# Altium PCB Connected_Cube.PcbDoc (part 1 of 4)
Units mil, origin at the board's own origin, x right, y up, seen from the top; angles counter-clockwise.
Board outline 4960.63 x 3700.79 mil, 4 copper layers (Top Layer, GND, Power, Bottom Layer), stack 47.164 mil thick; 209 components, 203 nets, 946 pads, 737 vias.
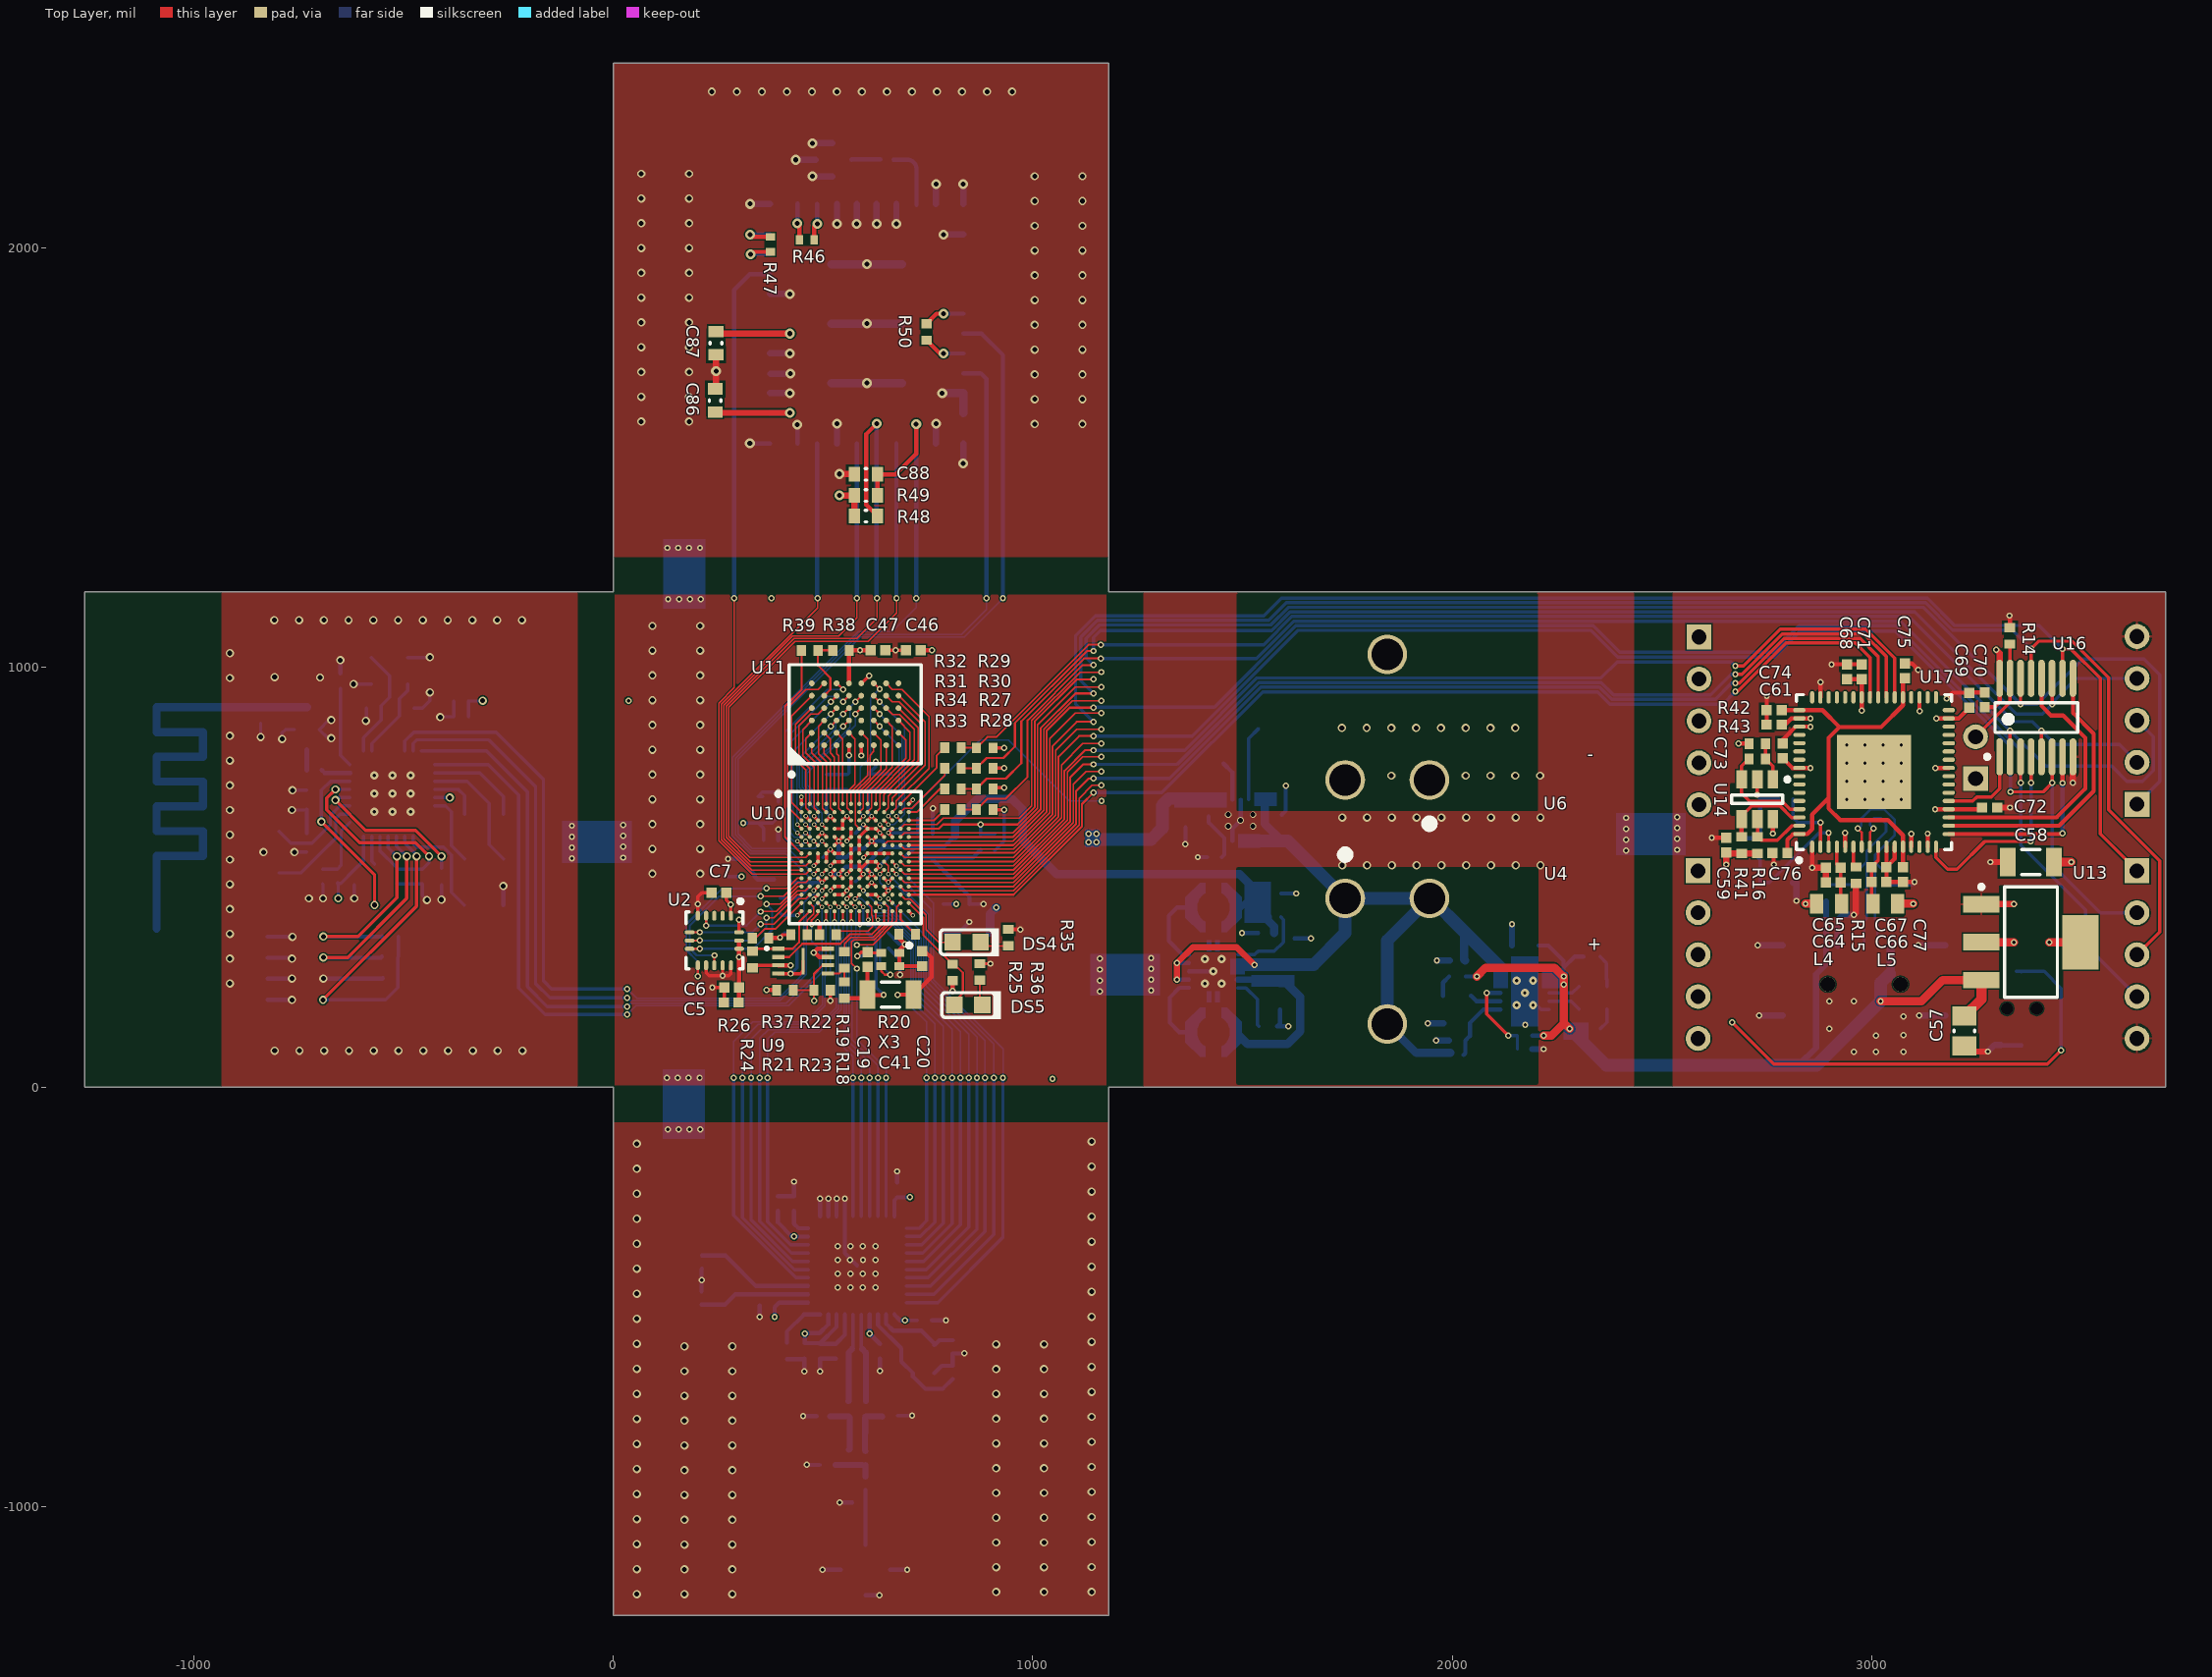
[diagram p0: Top Layer view]
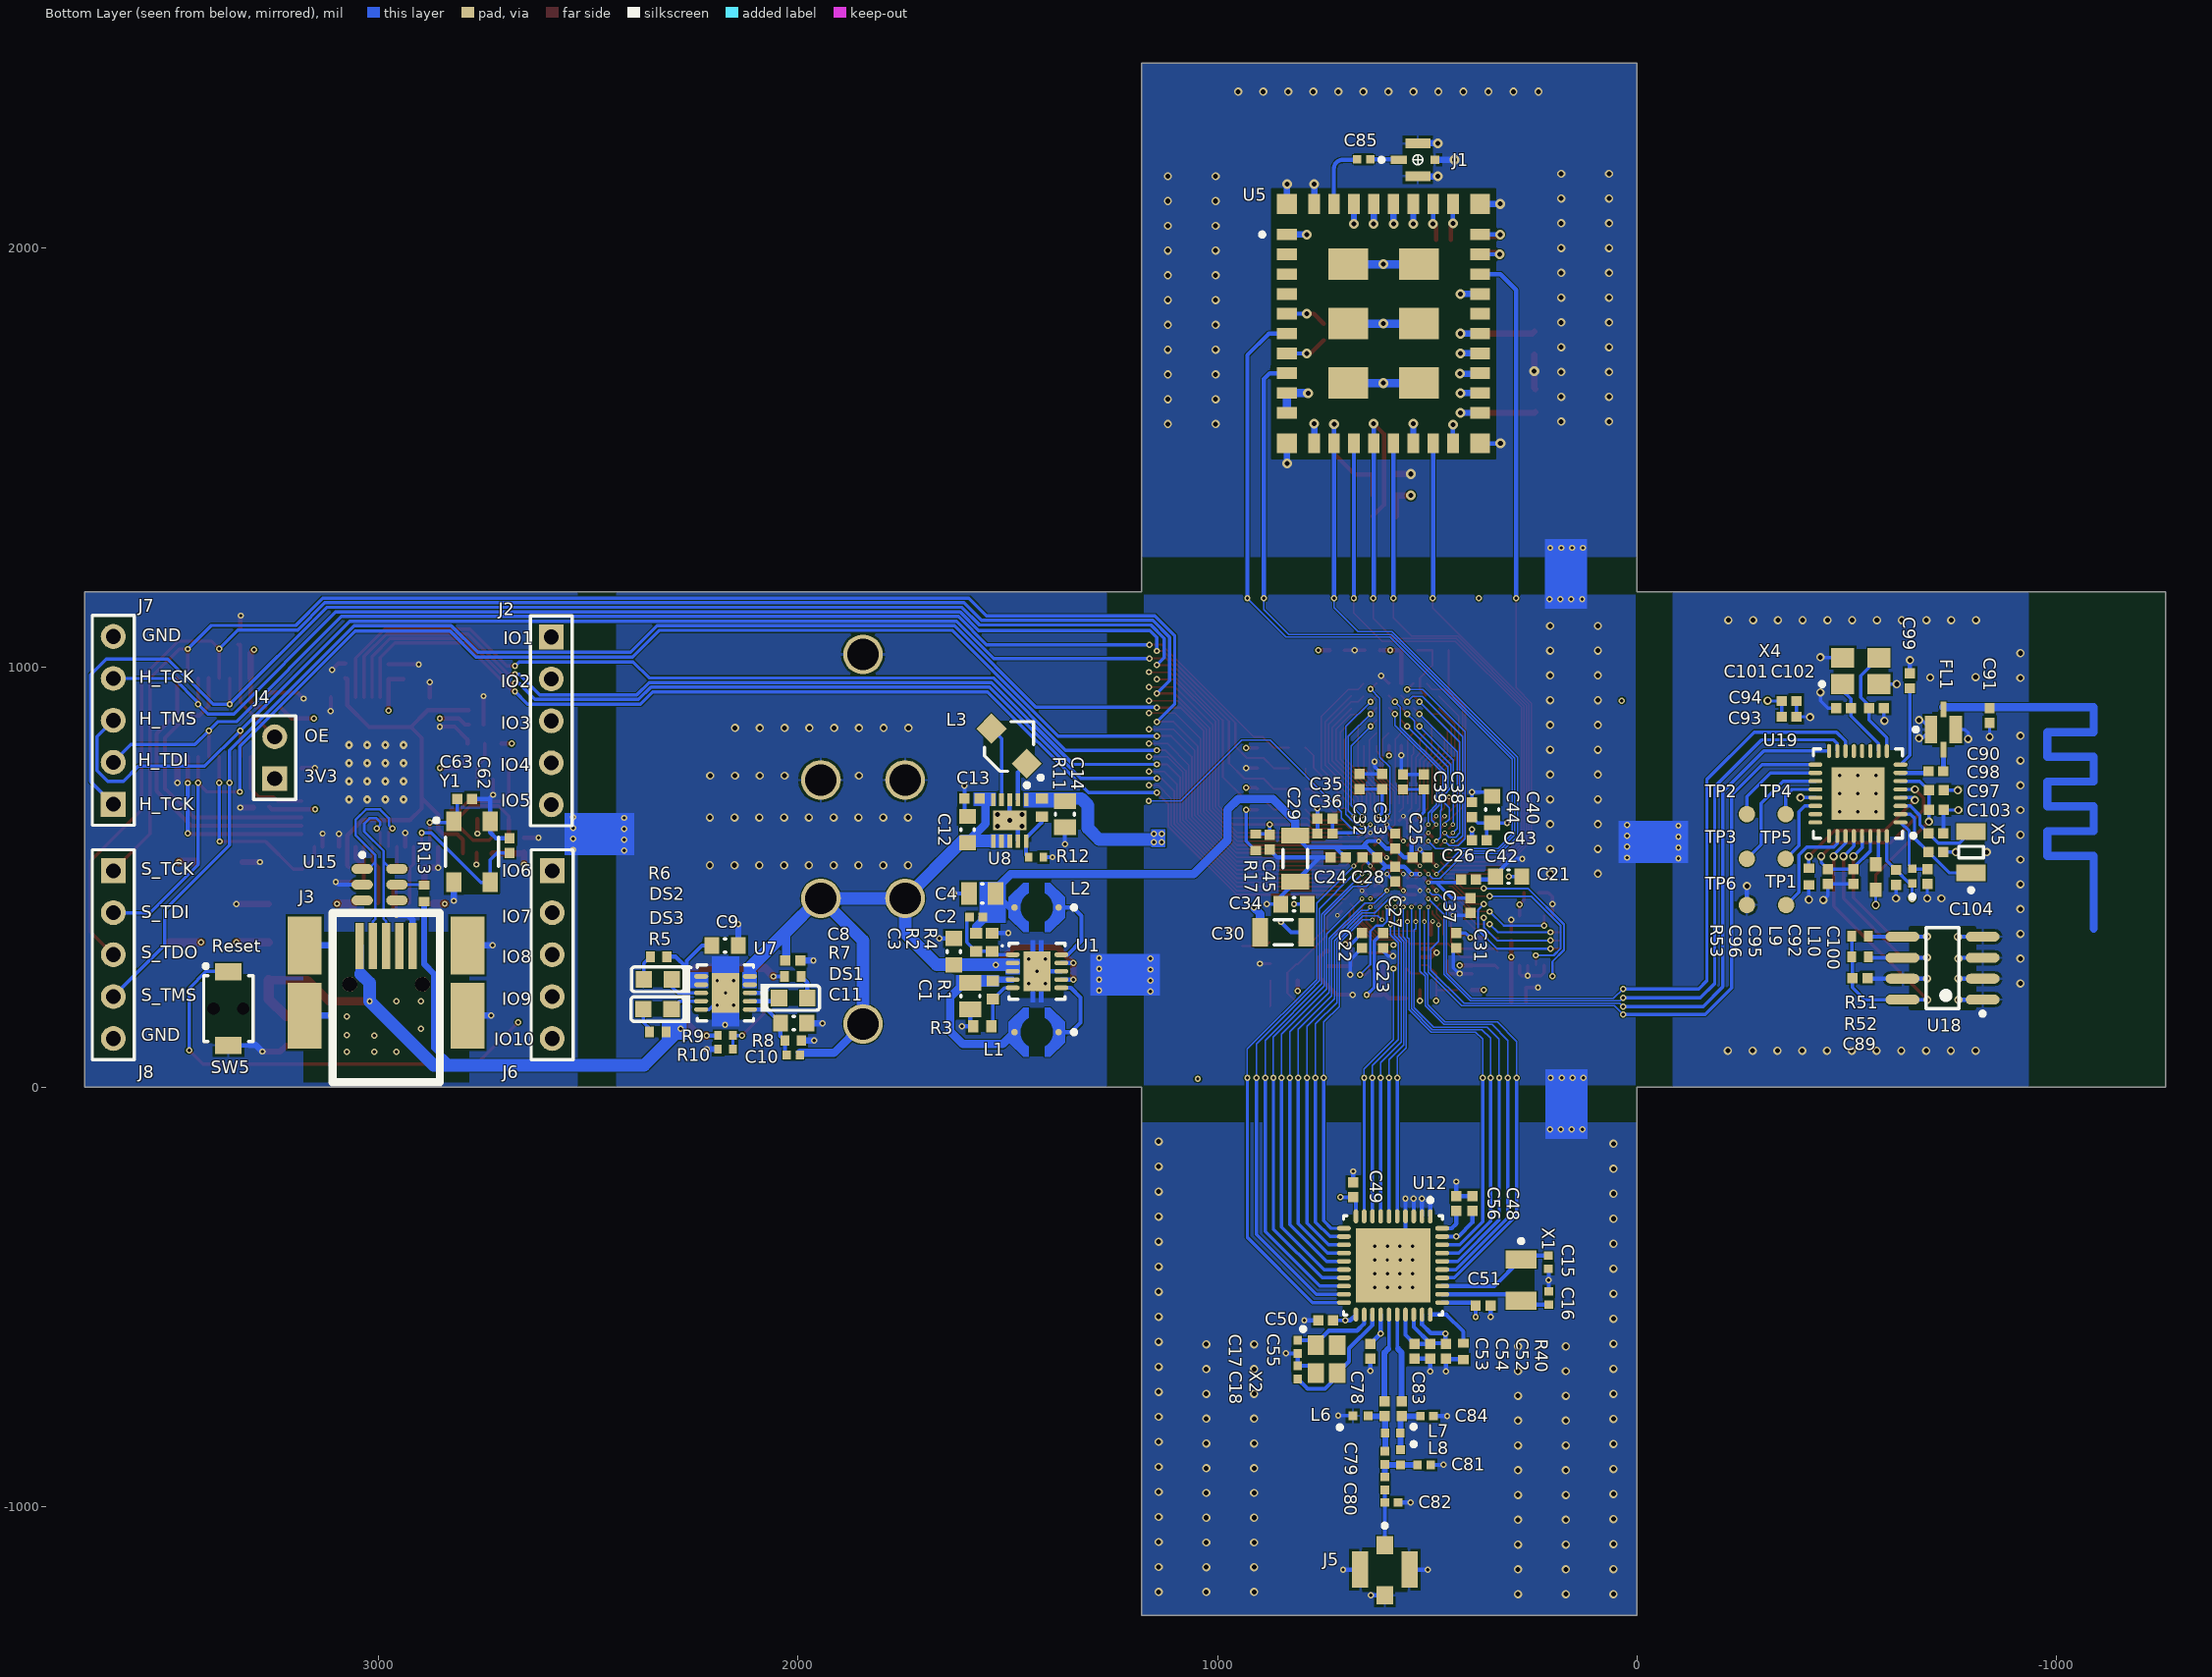
[diagram p1: Bottom Layer view, seen from below]
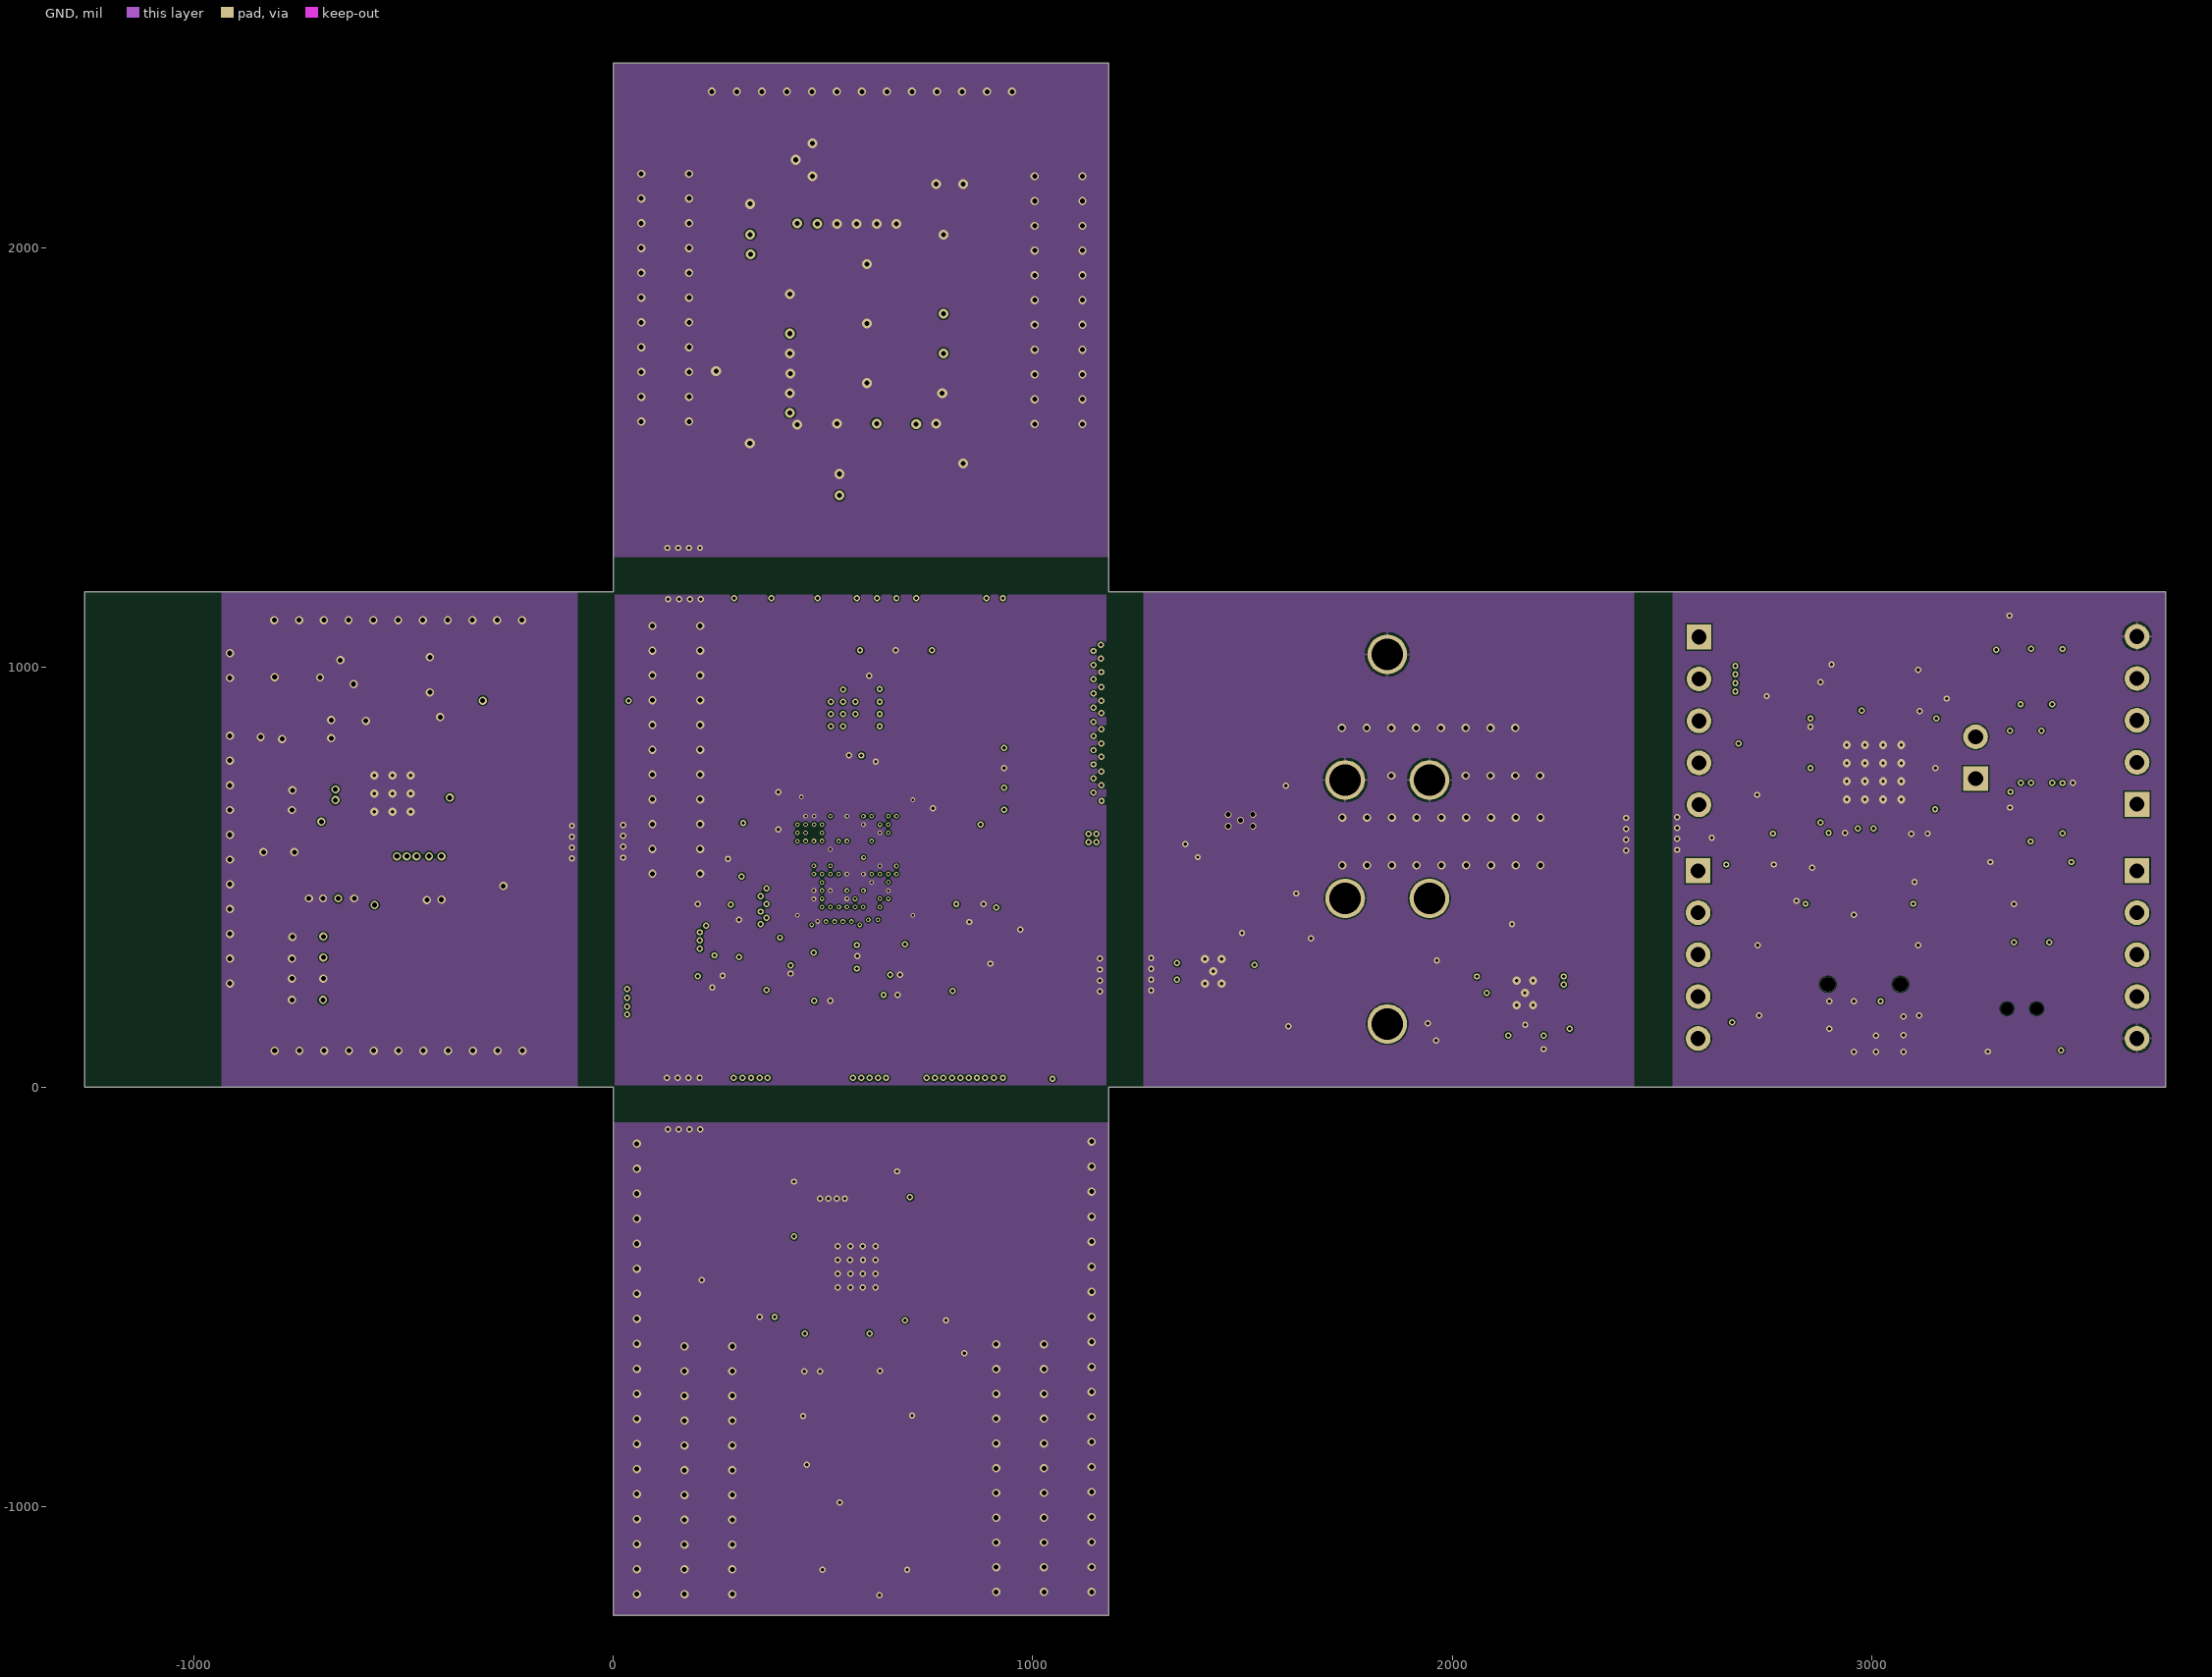
[diagram p2: GND]
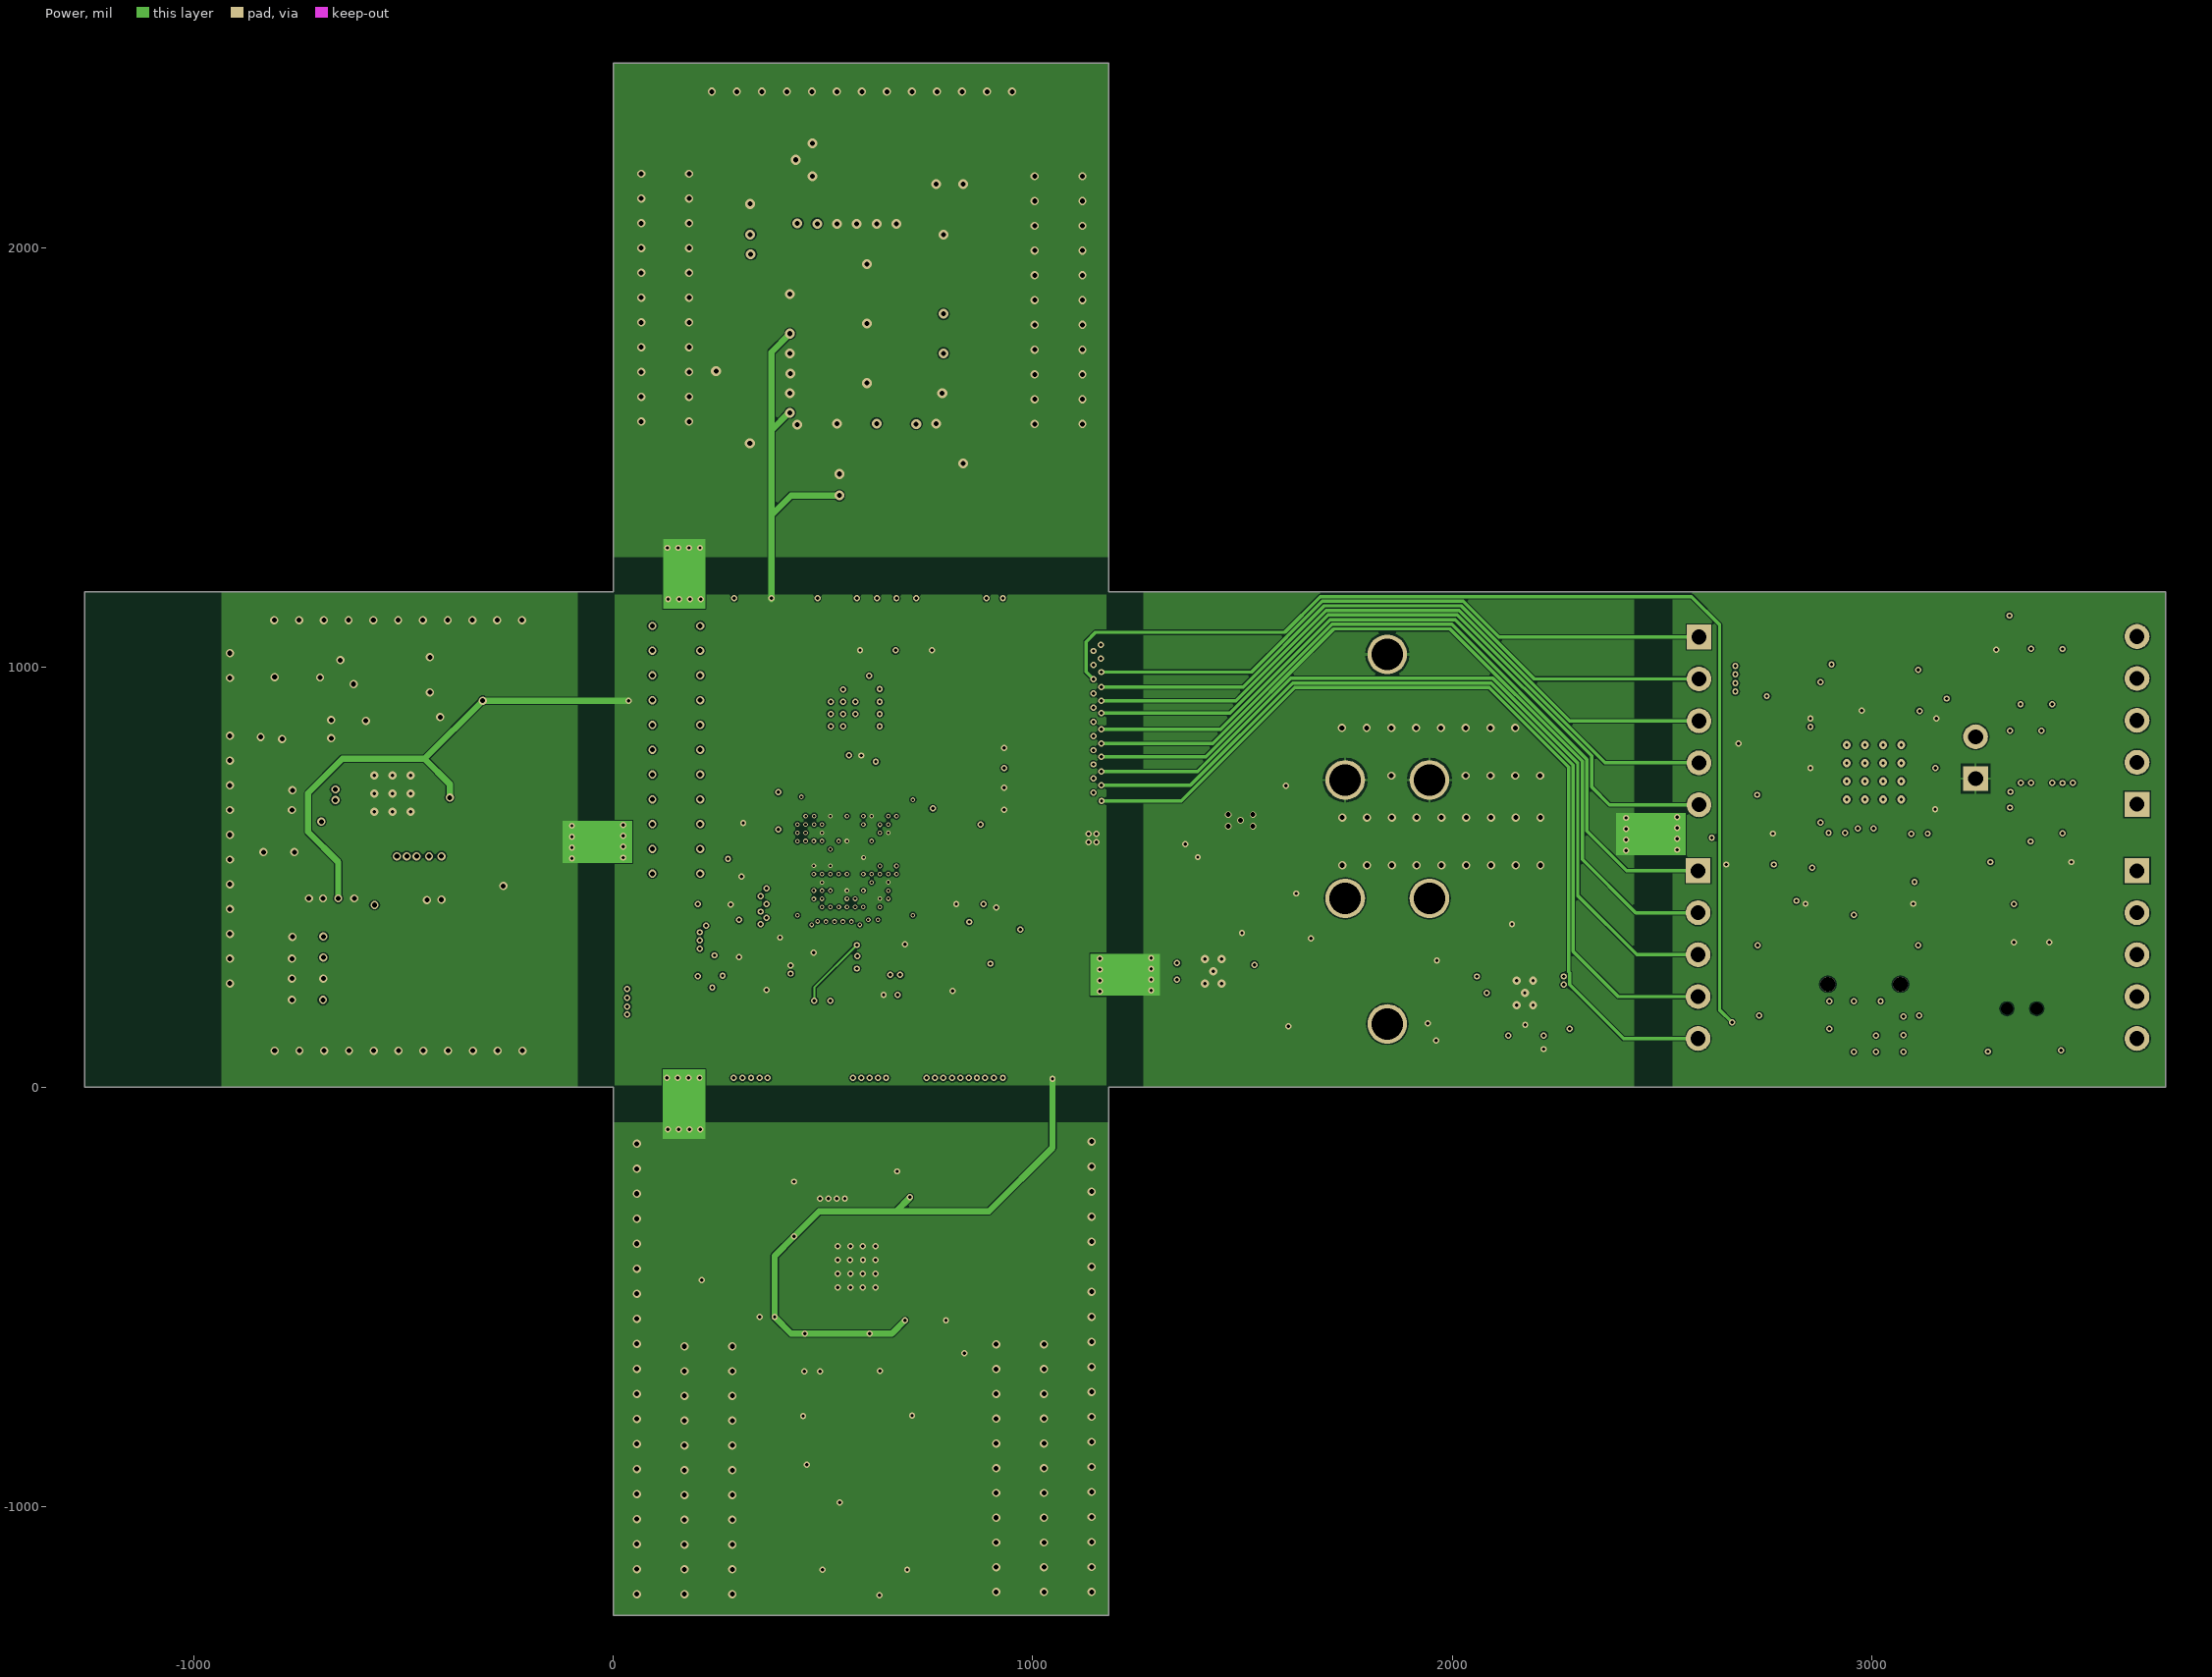
[diagram p3: Power]

## Layer stack, top to bottom
Top Solder: solder mask 0.394, Solder Resist, Dk 3.5
Top Layer: signal copper 1.417
Dielectric 1: prepreg 4.803, FR-4, Dk 4.2
GND: signal copper 1.417
DielectricLayer: core 31.89, Dk 4.2
Power: signal copper 1.417
DielectricLayer: prepreg 4.803, Dk 4.2
Bottom Layer: signal copper 1.417
Bottom Solder: solder mask 0.394, Solder Resist, Dk 3.5

## Board outline
-1259.84,0 0,0 0,-1259.84 1181.1,-1259.84 1181.1,0 3700.79,0 3700.79,1181.1 1181.1,1181.1 1181.1,2440.95 0,2440.95 0,1181.1 -1259.84,1181.1
board region "Layer Stack Region 2": 2519.68,1181.1 3700.79,1181.1 3700.79,0 2519.68,0
board region "Layer Stack Region 2": 2519.69,0 2440.94,0 2440.94,1181.1 2519.69,1181.1
board region "Layer Stack Region 2": 1181.1,-78.74 1181.1,-1259.84 0,-1259.84 0,-78.74
board region "Layer Stack Region 2": 1181.1,1181.1 1259.84,1181.1 1259.84,0 1181.1,0
board region "Layer Stack Region 2": 2440.95,0 1259.84,0 1259.84,1181.1 2440.95,1181.1
board region "Layer Stack Region 2": 0,-78.74 0,0 1181.1,0 1181.1,-78.74
board region "Layer Stack Region 2": 0,1259.84 0,2440.95 1181.1,2440.95 1181.1,1259.84
board region "Layer Stack Region 2": 1181.1,1181.1 0,1181.1 0,1259.84 1181.1,1259.84
board region "Layer Stack Region 2": 1181.1,0 0,0 0,1181.1 1181.1,1181.1
board region "Layer Stack Region 2": 0,1181.1 0,0 -78.74,0 -78.74,1181.1
board region "Layer Stack Region 1": -78.74,0 -1259.84,0 -1259.84,1181.1 -78.74,1181.1

## Design rules (kind name [scope] priority, off if disabled: settings)
Clearance SRAM1 [Ispad and InComponent('U13') vs Isvia] p1: gap=4
Clearance SRAM0 [Ispad and InComponent('U10') vs IsVia] p2: gap=3
Clearance "USB DATA" [InNet('D_N') vs InNet('D_P')] p3: gap=8
Clearance Clearance_PWR [InNetClass('PWR') vs InNetClass('PWR')] p4: gap=6
Clearance Clearance_Polygon [InPolygon vs InPolygon] p5: gap=6
Clearance Clear [All] p6: gap=3
ComponentClearance [Not InComponentClass('PCBModule') vs Not InComponentClass('PCBModule')] p1: gap=10 collisioncheckmode=3 verticalgap=3.94 showdistances=FALSE
DiffPairsRouting [All] p1: maxlimit=15 minlimit=5 mostfreqgap=15 toplayer_minwidth=5 toplayer_maxwidth=15 toplayer_prefwidth=15 midlayer1_minwidth=5 midlayer1_maxwidth=15 midlayer1_prefwidth=15 midlayer2_minwidth=5 midlayer2_maxwidth=15 midlayer2_prefwidth=15 bottomlayer_minwidth=5 bottomlayer_maxwidth=15 bottomlayer_prefwidth=15 maxuncoupledlength=500
HoleSize [All] p1: absolutevalues=TRUE maxlimit=216.54 minlimit=1 maxpercent=80.000 minpercent=20.000
MinimumSolderMaskSliver [All] p1: minsoldermaskwidth=3
NetAntennae NetAntennae_1 [InNet('ANT_RF')] p1: netantennaetolerance=99999
NetAntennae [All] p2: netantennaetolerance=0
PolygonConnect FT2232 [All vs (ObjectKind = 'Pad') And (Layer = 'Top Layer') And (Name = 'U3-65')] p1: connectstyle=Direct reliefconductorwidth=10 reliefentries=4 polygonreliefangle="90 Angle" airgapwidth=10
PolygonConnect PolygonConnect_Via [IsVia] p2: connectstyle=Direct reliefconductorwidth=10 reliefentries=4 polygonreliefangle="90 Angle" airgapwidth=10
PolygonConnect [All] p3: connectstyle=Relief reliefconductorwidth=5.91 reliefentries=4 polygonreliefangle="90 Angle" airgapwidth=5.91
RoutingVias [All] p1: holewidth=6 width=11 viastyle="Through Hole" minholewidth=4 minwidth=10 maxholewidth=12 maxwidth=20
ShortCircuit [IsRegion vs IsPolygon] p1: allowed=TRUE
SilkToSilkClearance SilkToSilkClearance_1 [(ObjectKind = 'Text') And (StringText = 'Designed & Made in China') vs (ObjectKind = 'Text') And (StringText = 'Digital Designer Board')] p1: silktosilkclearance=0
SilkToSilkClearance [All] p2: silktosilkclearance=0
SilkToSolderMaskClearance Soldermasker_j3 [ispad and InComponent('j3')] p1: minsilkscreentomaskgap=0 clearancetoexposedcopper=TRUE
SilkToSolderMaskClearance Soldermasker_j9 [ispad and InComponent('j9')] p2: minsilkscreentomaskgap=0 clearancetoexposedcopper=TRUE
SilkToSolderMaskClearance Soldermasker_j10 [ispad and InComponent('j10')] p3: minsilkscreentomaskgap=0 clearancetoexposedcopper=TRUE
SilkToSolderMaskClearance Soldermasker_j11 [ispad and InComponent('j11')] p4: minsilkscreentomaskgap=0 clearancetoexposedcopper=TRUE
SilkToSolderMaskClearance Soldermasker_j12 [ispad and InComponent('j12')] p5: minsilkscreentomaskgap=0 clearancetoexposedcopper=TRUE
SilkToSolderMaskClearance SilkscreenOverComponentPads [IsPad] p6: minsilkscreentomaskgap=4 clearancetoexposedcopper=TRUE
SolderMaskExpansion [All] p1: expansion=0
Width Width_Power [InNetClass('PWR')] p1: maxlimit=120 minlimit=3 preferedwidth=10 toplayer_prefwidth=3 midlayer1_minwidth=10 midlayer2_minwidth=10 bottomlayer_prefwidth=3 minimp=50.000000 maximp=50.000000 favimp=50.000000
Width [All] p2: maxlimit=80 minlimit=3 preferedwidth=5 toplayer_prefwidth=3 midlayer1_minwidth=5 midlayer2_minwidth=5 bottomlayer_prefwidth=3 minimp=50.000000 maximp=50.000000 favimp=50.000000
22 further rules are at their usual default settings.

## Classes and differential pairs
net class D[0..15]: D0 D1 D2 D3 D4 D5 D6 D7 D8 D9 D10 D11 D12 D13 D14 D15
net class A[0..17]: A0 A1 A2 A3 A4 A5 A6 A7 A8 A9 A10 A11 A12 A13 A14 A15 A16 A17
component class USB_Connector: J3
component class Accelerometer: C5 C6 C7 U2
component class Zigbee_Transceiver: C48 C49 C50 C51 C52 C53 C54 C55 C56 C78 C79 C80 C81 C82 C83 C84 L6 L7 L8 R40 U12
component class SRAM: C46 C47 R38 R39 U11
component class RESET: C45 R17 SW5
component class OSC_50MHz: X3
component class FPGA: C21 C22 C23 C24 C25 C26 C27 C28 C29 C30 C31 C32 C33 C34 C35 C36 C37 C38 C39 C40 C41 C42 C43 C44 DS4 DS5 J7 J8 R18 R19 R20 R21 R22 R23 R24 R25 R26 R27 R28 R29 R30 R31 R32 R33 R34 R35 R36 R37 U10
component class Flash: C19 C20 U9
component class Crystal_32MHz: C17 C18 X2
component class Crystal_32K: C15 C16 X1
component class Battery: U4 U6
component class Battery_Charger: C8 C9 C10 C11 DS1 DS2 DS3 R5 R6 R7 R8 R9 R10 U7
component class 3V3_DCDC: C12 C13 C14 L3 R11 R12 U8
component class 1V8&1V2_DCDC: C1 C2 C3 C4 L1 L2 R1 R2 R3 R4 U1
component class 12MHz: C62 C63 Y1
component class DMUX_JTAG: C61 J4 R14 U16
component class EEPROM: C59 U14
component class ESD_Protector: R13 U15
component class FT2232: C64 C65 C66 C67 C68 C69 C70 C71 C72 C73 C74 C75 C76 C77 L4 L5 R15 R16 R41 R42 R43 U17
component class IO_Connector: J2 J6
component class LDO_3V3: C57 C58 U13
component class SMA: J5
component class RF_ANT: C85 J1
component class WiFi_CC3000: C86 C87 C88 R46 R47 R48 R49 U5
component class EEPROM: C89 R51 R52 U18
component class LC_Filter: C90 C91 FL1
component class Bluetooth: C92 C93 C94 C95 C96 C97 C98 C99 C100 L9 L10 R53 U19
component class Q2: C103 C104 X5
component class Programmer: TP1 TP2 TP3 TP4 TP5 TP6
component class 16MHz_Clock: C101 C102 X4
component class WIFI: R50
differential pair D: +D_P -D_N

## Components (designator, comment, footprint, x,y, rotation, side; value= is the part's Value field where it differs from the comment)
C1 "CAP 22uF 10V 0805(2012)" CAPC0805(2012)145_L 1589.57,216.54 r90 bottom
C2 "CAP 33pF 16V 0402(1005)" CAPC0402(1005)60_L 1575.79,405.51 r180 bottom
C3 "CAP 10uF 10V 0603(1608)" CAPC0603(1608)100_N 1629.09,322.83 r270 bottom
C4 "CAP 22uF 10V 0805(2012)" CAPC0805(2012)145_L 1561.02,461.61 r180 bottom
C5 "CAP 100nF 16V 0402(1005)" CAPC0402(1005)60_N 281.5,201.77 r180 top
C6 "CAP 100nF 16V 0402(1005)" CAPC0402(1005)60_N 282.48,237.2 r180 top
C7 "CAP 1uF 16V 0402(1005)" CAPC0402(1005)60_N 251.97,463.58 r0 top
C8 "CAP 1uF 10V 0402(1005)" CAPC0402(1005)60_N 2012.8,302.17 r180 bottom
C9 "CAP 4.7uF 16V 0603(1608)" CAPC0603(1608)100_N 2174.21,337.6 r180 bottom
C10 "CAP 100nF 10V 0402(1005)" CAPC0402(1005)60_L 2011.81,76.54 r0 bottom
C11 "CAP 2.2uF 16V 0603(1608)" CAPC0603(1608)55_N 2010.83,152.32 r180 bottom
C12 "CAP 10uF 10V 0603(1608)" CAPC0603(1608)100_N 1596.46,614.17 r270 bottom
C13 "CAP 100nF 25V 0402(1005)" CAPC0402(1005)60_N 1585.63,687.99 r0 bottom
C14 "CAP 22uF 10V 0805(2012)" CAPC0805(2012)145_L 1364.17,650.59 r90 bottom
C15 "CAP 15pF 16V 0402(1005)" CAPC0402(1005)60_L 211.61,-417.32 r90 bottom
C16 "CAP 15pF 16V 0402(1005)" CAPC0402(1005)60_L 210.63,-502.95 r270 bottom
C17 "CAP 27pF 16V 0402(1005)" CAPC0402(1005)60_L 809.06,-619.09 r90 bottom
C18 "CAP 27pF 16V 0402(1005)" CAPC0402(1005)60_L 809.06,-680.12 r270 bottom
C19 "CAP 10nF 6.3V 0402(1005)" CAPC0402(1005)60_N 606.3,304.13 r90 top
C20 "CAP 100nF 6.3V 0402(1005)" CAPC0402(1005)60_N 736.22,306.1 r270 top
C21 "CAP 10uF 6.3V 0603(1608)" CAPC0603(1608)100_N 306.1,501.97 r180 bottom
C22 "CAP 4.7uF 6.3V 0402(1005)" CAPC0402(1005)60_N 655.51,349.41 r270 bottom
C23 "CAP 470nF 6.3V 0402(1005)" CAPC0402(1005)60_N 605.32,349.41 r90 bottom
C24 "CAP 470nF 6.3V 0402(1005)" CAPC0402(1005)60_N 712.6,547.24 r180 bottom
C25 "CAP 4.7uF 6.3V 0402(1005)" CAPC0402(1005)60_N 576.77,586.61 r270 bottom
C26 "CAP 4.7uF 6.3V 0402(1005)" CAPC0402(1005)60_N 517.72,547.24 r0 bottom
C27 "CAP 4.7uF 6.3V 0402(1005)" CAPC0402(1005)60_N 576.77,507.87 r90 bottom
C28 "CAP 4.7uF 6.3V 0402(1005)" CAPC0402(1005)60_N 636.81,547.24 r0 bottom
C29 "CAP 100uF 6.3V 1206(3216)" CAPC1206(3216)190_L 814.96,544.29 r90 bottom
C30 "CAP 100uF 6.3V 1206(3216)" CAPC1206(3216)190_L 843.5,369.09 r0 bottom
C31 "CAP 4.7uF 6.3V 0402(1005)" CAPC0402(1005)60_N 431.1,349.41 r90 bottom
C32 "CAP 470nF 6.3V 0402(1005)" CAPC0402(1005)60_N 661.42,728.35 r270 bottom
C33 "CAP 470nF 6.3V 0402(1005)" CAPC0402(1005)60_N 608.27,728.35 r270 bottom
C34 "CAP 10uF 6.3V 0603(1608)" CAPC0603(1608)100_N 817.91,436.02 r180 bottom
C35 "CAP 4.7uF 6.3V 0402(1005)" CAPC0402(1005)60_N 744.09,639.76 r0 bottom
C36 "CAP 470nF 6.3V 0402(1005)" CAPC0402(1005)60_N 744.09,604.33 r180 bottom
C37 "CAP 470nF 6.3V 0402(1005)" CAPC0402(1005)60_N 397.64,433.07 r90 bottom
C38 "CAP 470nF 6.3V 0402(1005)" CAPC0402(1005)60_N 507.87,727.36 r270 bottom
C39 "CAP 4.7uF 6.3V 0402(1005)" CAPC0402(1005)60_N 558.07,727.36 r90 bottom
C40 "CAP 10uF 6.3V 0603(1608)" CAPC0603(1608)100_N 345.47,661.42 r270 bottom
C41 "CAP 100uF 6.3V 1206(3216)" CAPC1206(3216)190_L 661.42,220.47 r0 top
C42 "CAP 4.7uF 6.3V 0402(1005)" CAPC0402(1005)60_N 401.57,495.08 r0 bottom
C43 "CAP 470nF 6.3V 0402(1005)" CAPC0402(1005)60_N 375.98,588.58 r180 bottom
C44 "CAP 470nF 6.3V 0402(1005)" CAPC0402(1005)60_N 393.7,661.42 r270 bottom
C45 "CAP 10nF 6.3V 0402(1005)" CAPC0402(1005)60_N 875.98,583.66 r270 bottom
C46 "CAP 100nF 16V 0402(1005)" CAPC0402(1005)60_N 715.55,1041.34 r0 top
C47 "CAP 100nF 16V 0402(1005)" CAPC0402(1005)60_N 630.91,1041.34 r180 top
C48 "CAP 1uF 10V 0402(1005)" CAPC0402(1005)60_N 392.72,-277.56 r270 bottom
C49 "CAP 100nF 16V 0402(1005)" CAPC0402(1005)60_N 677.17,-245.08 r270 bottom
C50 "CAP 100nF 16V 0402(1005)" CAPC0402(1005)60_N 742.13,-556.1 r180 bottom
C51 "CAP 100nF 16V 0402(1005)" CAPC0402(1005)60_N 367.13,-520.67 r0 bottom
C52 "CAP 100nF 16V 0402(1005)" CAPC0402(1005)60_N 455.71,-629.92 r90 bottom
C53 "CAP 100nF 16V 0402(1005)" CAPC0402(1005)60_N 530.51,-629.92 r90 bottom
C54 "CAP 100nF 16V 0402(1005)" CAPC0402(1005)60_N 493.11,-629.92 r90 bottom
C55 "CAP 100nF 16V 0402(1005)" CAPC0402(1005)60_N 635.83,-629.92 r90 bottom
C56 "CAP 1uF 10V 0402(1005)" CAPC0402(1005)60_N 431.1,-277.56 r270 bottom
C57 "CAP 10uF 10V 0805(2012)" CAPC0805(2012)100_N 3221.46,133.86 r90 top
C58 "CAP 22uF 6.3V 1206(3216)" CAPC1206(3216)100_L 3379.92,536.42 r0 top
C59 "CAP 100nF 10V 0402(1005)" CAPC0402(1005)60_N 2653.54,576.77 r90 top
C61 "CAP 100nF 6.3V 0402(1005)" CAPC0402(1005)60_N 2767.72,864.17 r0 top
C62 "CAP 27pF 50V 0402(1005)" CAPC0402(1005)60_N 2687.99,575.79 r90 bottom
C63 "CAP 27pF 50V 0402(1005)" CAPC0402(1005)60_N 2795.28,687.01 r180 bottom
C64 "CAP 4.7uF 6.3V 0402(1005)" CAPC0402(1005)60_N 2908.46,488.19 r180 top
C65 "CAP 100nF 16V 0402(1005)" CAPC0402(1005)60_N 2908.46,522.64 r180 top
C66 "CAP 4.7uF 6.3V 0402(1005)" CAPC0402(1005)60_N 3017.72,489.17 r180 top
C67 "CAP 100nF 16V 0402(1005)" CAPC0402(1005)60_N 3017.72,524.61 r180 top
C68 "CAP 4.7uF 6.3V 0402(1005)" CAPC0402(1005)60_N 2940.94,990.16 r90 top
C69 "CAP 100nF 16V 0402(1005)" CAPC0402(1005)60_N 3233.27,922.24 r90 top
C70 "CAP 100nF 16V 0402(1005)" CAPC0402(1005)60_N 3269.68,923.23 r90 top
C71 "CAP 100nF 16V 0402(1005)" CAPC0402(1005)60_N 2976.38,990.16 r90 top
C72 "CAP 100nF 16V 0402(1005)" CAPC0402(1005)60_N 3281.5,666.34 r0 top
C73 "CAP 100nF 16V 0402(1005)" CAPC0402(1005)60_N 2788.39,801.18 r90 top
C74 "CAP 3.3uF 6.3V 0402(1005)" CAPC0402(1005)60_N 2767.72,898.62 r0 top
C75 "CAP 100nF 16V 0402(1005)" CAPC0402(1005)60_N 3079.72,992.13 r90 top
C76 "CAP 100nF 16V 0402(1005)" CAPC0402(1005)60_N 2781.5,558.07 r180 top
C77 "CAP 100nF 16V 0402(1005)" CAPC0402(1005)60_N 3074.8,506.89 r270 top
C78 "CAP 18pF 25V 0402(1005)" CAPC0402(1005)60_N 602.25,-766.73 r90 bottom
C79 "CAP 1pF 25V 0402(1005)" CAPC0402(1005)60_L 601.38,-883.86 r90 bottom
C80 "CAP 2.2pF 25V 0402(1005)" CAPC0402(1005)60_L 601.38,-944.88 r270 bottom
C81 "NP" CAPC0402(1005)60_L 507.87,-900.59 r0 bottom
C82 "NP" CAPC0402(1005)60_L 585.63,-990.16 r0 bottom
C83 "CAP 18pF 25V 0402(1005)" CAPC0402(1005)60_N 561.15,-766.73 r90 bottom
C84 "CAP 1pF 25V 0402(1005)" CAPC0402(1005)60_L 500.98,-784.45 r180 bottom
C85 "CAP 10pF 10V 0402(1005)" CAPC0402(1005)60_L 651.57,2211.61 r180 bottom (schematic designator C12)
C86 "CAP 1uF 10V 0603(1608)" CAPC0603(1608)100_L 243.11,1636.81 r270 top (schematic designator C21)
C87 "CAP 1uF 10V 0603(1608)" CAPC0603(1608)100_L 245.08,1773.62 r90 top (schematic designator C22)
C88 "CAP 15pF 10V 0603(1608)" CAPC0603(1608)100_L 602.36,1460.63 r0 top (schematic designator C25)
C89 "CAP 1uF 6.3V 0402(1005)" CAPC0402(1005)60_N -531.5,259.84 r0 bottom (schematic designator C22)
C90 "CAP 22pF 16V 0402(1005)" CAPC0402(1005)60_N -712.6,752.95 r180 bottom (schematic designator C14)
C91 "CAP 1.5pF 10V 0402(1005)" CAPC0402(1005)60_N -840.55,885.83 r90 bottom (schematic designator C26)
C92 "CAP 2.2uF 6.3V 0402(1005)" CAPC0402(1005)60_N -617.13,500 r90 bottom (schematic designator C5)
C93 "CAP 100nF 6.3V 0402(1005)" CAPC0402(1005)60_N -362.2,882.87 r0 bottom (schematic designator C6)
C94 "CAP 100nF 6.3V 0402(1005)" CAPC0402(1005)60_N -362.2,920.28 r0 bottom (schematic designator C7)
C95 "CAP 470nF 6.3V 0402(1005)" CAPC0402(1005)60_N -515.75,501.97 r90 bottom (schematic designator C8)
C96 "CAP 100nF 6.3V 0402(1005)" CAPC0402(1005)60_N -454.72,501.97 r90 bottom (schematic designator C9)
C97 "CAP 2.2uF 6.3V 0402(1005)" CAPC0402(1005)60_N -713.58,661.42 r0 bottom (schematic designator C10)
C98 "CAP 470nF 6.3V 0402(1005)" CAPC0402(1005)60_N -713.58,707.68 r0 bottom (schematic designator C11)
C99 "CAP 470nF 6.3V 0402(1005)" CAPC0402(1005)60_N -650.59,968.5 r270 bottom (schematic designator C12)
C100 "CAP 33pF 10V 0402(1005)" CAPC0402(1005)60_N -692.91,501.97 r90 bottom (schematic designator C13)
C101 "CAP 20pF 10V 0402(1005)" CAPC0402(1005)60_N -492.13,903.54 r0 bottom (schematic designator C1)
C102 "CAP 20pF 10V 0402(1005)" CAPC0402(1005)60_N -570.87,903.54 r180 bottom (schematic designator C2)
C103 "CAP 24pF 10V 0402(1005)" CAPC0402(1005)60_N -712.6,605.32 r0 bottom (schematic designator C3)
C104 "CAP 24pF 10V 0402(1005)" CAPC0402(1005)60_N -712.6,560.04 r0 bottom (schematic designator C4)
DS1 "APG1608SURKC/T" KING-0603(1608)25-Red 2011.81,212.52 r180 bottom
DS2 "APG1608SEKC/T" KING-0603(1608)25-Orange 2334.65,256.89 r0 bottom
DS3 "APG1608CGKC/T" KING-0603(1608)25-Green 2335.63,186.02 r0 bottom
DS4 "APG1608SEKC/T" KING-0603(1608)25-Orange 842.52,345.47 r180 top
DS5 "APG1608CGKC/T" KING-0603(1608)25-Green 846.46,195.71 r180 top
FL1 "LFB212G45SG8A143" MUR-LFB212G45SG8A143-4 -730.32,852.36 r90 bottom
J1 "CMP-0275-00001-1" TG-RECE-20369-001E-4_V 522.64,2210.63 r270 bottom (schematic designator C11)
J2 "HDR5X1-P254-V-M-A" HDR5X1-P254-V-M-A 2588.47,1073 r270 bottom
J3 "P01BTO" Qiwei-SMD 3045.28,336.61 r90 bottom
J4 "HDR2X1-P254-V-M" HDR2X1-P254-V-M 3248.03,735.24 r0 bottom
J5 "73412-0110" MOLX-73412-0110 601.38,-1150.59 r0 bottom
J6 "HDR5X1-P254-V-M-A" HDR5X1-P254-V-M-A 2586.52,515.75 r270 bottom
J7 "HDR5X1-P254-V-M-A" HDR5X1-P254-V-M-A 3632.87,674.21 r90 bottom
J8 "HDR5X1-P254-V-M-A" HDR5X1-P254-V-M-A 3632.78,515.75 r270 bottom
L1 "SRU2013-2R2Y" BOUR-SRU2013-2R2Y-2_V 1431.1,130.91 r270 bottom
L2 "SRU2013-2R2Y" BOUR-SRU2013-2R2Y-2_V 1431.1,428.15 r270 bottom
L3 "1.5uH" SUMI-CDRH2D14NP-1R5NC-2_V 1497.05,812.99 r0 bottom
L4 "MLZ2012N100LT" TDK-0805(2012)125 2898.62,437.01 r0 top
L5 "MLZ2012N100LT" TDK-0805(2012)125 3032.48,437.01 r180 top
L6 "2nH" MURA-IND0402_V 659.45,-783.46 r0 bottom
L7 "NP" MURA-IND0402_V 582.68,-824.8 r180 bottom
L8 "2nH" MURA-IND0402_V 563.98,-882.87 r90 bottom
L9 "7447966" SMD-0603 -568.9,500.98 r270 bottom (schematic designator L1)
L10 "MMZ1005Y152CT" TDK-CHIP-2_V -656.5,502.95 r90 bottom (schematic designator L2)
R1 "374K" RESC0402(1005)_M 1535.43,231.3 r90 bottom
R2 "187K" RESC0402(1005)_M 1575.94,345.47 r90 bottom
R3 "187K" RESC0402(1005)_M 1561.02,144.68 r180 bottom
R4 "187K" RESC0402(1005)_M 1537.56,345.47 r270 bottom
R5 "330R" RESC0402(1005)_N 2334.65,131.89 r180 bottom
R6 "330R" RESC0402(1005)_N 2332.68,311.02 r180 bottom
R7 "330R" RESC0402(1005)_N 2012.8,263.78 r0 bottom
R8 "1K69" RESC0402(1005)_N 2011.81,110.98 r0 bottom
R9 "53K6" RESC0402(1005)_L 2173.23,123.03 r0 bottom
R10 "13K3" RESC0402(1005)_L 2173.23,90.55 r0 bottom
R11 "1M" RESC0402(1005)_M 1419.29,666.34 r90 bottom
R12 "178K" RESC0402(1005)_L 1433.07,548.23 r0 bottom
R13 "10K" RESC0402(1005)_N 2891.73,461.85 r90 bottom
R14 "1K 1% 0402(1005)" RESC0402(1005)_N 3329.72,1075.79 r90 top
R15 "12K" RESC0402(1005)_N 2962.6,504.92 r270 top
R16 "10K" RESC0402(1005)_N 2728.35,576.77 r270 top
R17 "10K 1% 0402(1005)" RESC0402(1005)_N 909.45,583.66 r90 bottom
R18 "10K" RESC0402(1005)_N 551.18,231.3 r90 top
R19 "49R9" RESC0402(1005)_N 551.18,303.15 r90 top
R20 "4K7" RESC0402(1005)_N 700.79,364.17 r180 top
R21 "100R" RESC0402(1005)_N 409.45,231.3 r180 top
R22 "1K" RESC0402(1005)_N 511.81,363.19 r180 top
R23 "100R" RESC0402(1005)_N 498.03,231.3 r180 top
R24 "10K" RESC0402(1005)_N 332.68,304.13 r270 top
R25 "330R" RESC0402(1005)_N 809.06,273.46 r90 top
R26 "4K7" RESC0402(1005)_N 351.38,355.32 r0 top
R27 "4K7" RESC0402(1005)_N 885.83,710.79 r0 top
R28 "4K7" RESC0402(1005)_N 885.83,661.42 r0 top
R29 "4K7" RESC0402(1005)_N 885.83,808.54 r0 top
R30 "1K" RESC0402(1005)_N 885.83,760.16 r0 top
R31 "49R9" RESC0402(1005)_N 810.04,760.16 r180 top
R32 "49R9" RESC0402(1005)_N 810.04,809.53 r180 top
R33 "49R9" RESC0402(1005)_N 810.04,661.42 r180 top
R34 "49R9" RESC0402(1005)_N 810.04,710.79 r180 top
R35 "330R" RESC0402(1005)_N 941.93,356.3 r90 top
R36 "330R" RESC0402(1005)_N 874.02,274.45 r90 top
R37 "4K7" RESC0402(1005)_N 442.91,363.19 r180 top
R38 "10K 1% 0402(1005)" RESC0402(1005)_N 543.3,1041.34 r0 top
R39 "Jumper 0402(1005)" RESC0402(1005)_N 468.5,1041.34 r0 top
R40 "56K" RESC0402(1005)_N 414.37,-629.92 r270 bottom
R41 "10K" RESC0402(1005)_N 2689.96,576.77 r270 top
R42 "10K" RESC0402(1005)_N 2727.36,818.9 r180 top
R43 "2K2" RESC0402(1005)_N 2727.36,782.48 r180 top
R46 "0R" RESC0402(1005)_L 461.61,2019.68 r180 top (schematic designator R3)
R47 "0R" RESC0402(1005)_L 375,2008.86 r270 top (schematic designator R2)
R48 "10K 5% 0603(1608)" RESC0603(1608)_L 602.36,1361.22 r180 top (schematic designator R10)
R49 "4K7 5% 0603(1608)" RESC0603(1608)_L 602.36,1410.43 r180 top (schematic designator R11)
R50 "0R" RESC0402(1005)_N 747.05,1800.2 r270 top
R51 "4K7 5% 0402(1005)" RESC0402(1005)_N -531.5,359.25 r0 bottom (schematic designator R9)
R52 "4K7 5% 0402(1005)" RESC0402(1005)_N -531.5,311.02 r0 bottom (schematic designator R10)
R53 "Jumper 0402(1005)" RESC0402(1005)_N -409.45,501.97 r270 bottom (schematic designator R16)
SW5 "TVAF06" JNFU-TVAF06-2 3358.27,187.01 r270 bottom
TP1 "TP-SM-C-100" TP-SM-C-100 -355.32,434.06 r180 bottom (schematic designator TP5)
TP2 "TP-SM-C-100" TP-SM-C-100 -261.81,650.59 r90 bottom (schematic designator TP6)
TP3 "TP-SM-C-100" TP-SM-C-100 -261.81,544.29 r90 bottom (schematic designator TP7)
TP4 "TP-SM-C-100" TP-SM-C-100 -354.33,650.59 r90 bottom (schematic designator TP8)
TP5 "TP-SM-C-100" TP-SM-C-100 -354.33,544.29 r90 bottom (schematic designator TP9)
TP6 "TP-SM-C-100" TP-SM-C-100 -261.81,434.06 r90 bottom (schematic designator TP10)
U1 "TPS62400DRCR" DRC10-2400X1650TP 1430.63,276.1 r180 bottom
U2 "LIS331DLTR" LGA16-3X3X1_L 241.14,349.41 r270 top
U4 "PCB_Clips_54" KEYSTONE-CLIPS_54-3_V 1845.47,264.76 r0 top locked
U5 "CC3000MOD" TI-CC3000MOD-46_V 604.33,1819.88 r180 bottom (schematic designator U3)
U6 "PCB_Clips_54" KEYSTONE-CLIPS_54-3_V 1845.47,917.32 r180 top locked
U7 "BQ24010DRCR" DRC10-2400X1650TP 2173.23,224.41 r180 bottom
U8 "TPS63030DSKT" TI-DSK10-2000X1200TP_V 1495.57,635.83 r270 bottom
U9 "MX25L4006EZUI-12G" MXIC-USON-8_V 452.76,300.2 r0 top
U10 "XC6SLX9-2CPG196C" CPG196 576.81,547.17 r0 top locked
U11 "IS61WV25616BLL-10BLI" ISSI-48L-TFBGA 576.77,888.78 r90 top locked
U12 "CC2530F256RHAT" TI-RHA40-4500X4500TP_V 581.69,-425.2 r270 bottom
U13 "NX1117C33Z" NXP-SOT223 3379.92,345.47 r0 top
U14 "93LC56BT-I/OT" SOT-23-OT6_N 2727.36,686.02 r270 top
U15 "NUP2201MR6T1G" ONSC-318G-02 2998.03,482.68 r180 bottom
U16 "SN74CBTLV3257DBQR" SSOP-16_N 3392.72,880.91 r90 top
U17 "FT2232HQ" QFN64_2_N 3005.91,750.98 r90 top
U18 "24AA512-I/SN" MCHP-SOIC-SN8_N -728.35,283.46 r0 bottom (schematic designator U3)
U19 "CSR1010A05-IQQM-R" CSR-CSR1010A05-IQQM-R-QFN32_M -526.58,699.8 r0 bottom (schematic designator U4)
X1 "ABS07-32.768KHz-T" ABRA-ABS07-2_V 276.57,-459.65 r270 bottom
X2 "CX2520DB32000D0GEJZ1" AVX-CX2520DB32000D0GEJZ1-4_V 740.16,-648.62 r180 bottom
X3 "ASCO-50.000MHZ-EK-T3" ABRA-ASCO-50.000MHZ-EK-T3-4_V 660.43,304.13 r180 top
X4 "21C00047-16.000MHz" ITTI-21C00047-16.000MHz-4_V -533.46,992.13 r180 bottom (schematic designator X1)
X5 "14340272-32.768KHz" ITTI-14340272-32.768KHz-2_V -796.26,560.04 r90 bottom (schematic designator X2)
Y1 "E5SB12.0000F20S33" HOSC-L500HW320H105-4 2777.56,561.02 r270 bottom

## Footprints (in the part's own frame and the unit in brackets; to place one, negate y for a bottom-side part, rotate by r counter-clockwise, add the part's x,y. Pads: shape width x height; smd on the part's side, far side on the other; paste and mask are expansions set on the pad)
ABRA-ABS07-2_V [mm] "Hand Drawn, 2-Leads, Body 3.2x1.5mm, Pitch 2.5mm"
  rect 1.1x1.9 smd: 1(-1.25,0) 2(1.25,0)
  silkscreen extent -2.47,-0.13 -2.23,0.12, body extent -1.6,-0.75 1.6,0.75, height 0.9
ABRA-ASCO-50.000MHZ-EK-T3-4_V [mm] "Hand Drawn, 4-Leads, Body 1.6x1.2mm"
  rect 0.6x0.5 smd: 1(-0.55,-0.4) 2(0.55,-0.4) 3(0.55,0.4) 4(-0.55,0.4)
  silkscreen extent -1.28,-0.97 -1.03,-0.73, body extent -0.8,-0.6 0.8,0.6, height 0.7
AVX-CX2520DB32000D0GEJZ1-4_V [mm] "Hand Drawn, 4-Leads,Body 2.5x2mm"
  rect 1x1.2 smd: 1(-0.65,0.85) 2(-0.65,-0.85) 3(0.65,-0.85) 4(0.65,0.85)
  silkscreen extent -1.55,1.7 -1.3,1.95, body extent -1,-1.25 1,1.25, height 0.55
BOUR-SRU2013-2R2Y-2_V [mm] "Hand Drawn, 2-Leads, Body 2.8x2.8mm"
  round 0.4 smd: 1(0,1.321) 2(0,-1.346)
  Top Layer region: 1.5,-0.5 1.5,-0.5 1.5,-0.5 1.5,-0.5 1.5,-0.5 1.5,-0.5 1.5,-0.82 1.5,-0.82 1.5,-0.82 1.5,-0.82 0.62,-1.7 0.62,-1.7 0.62,-1.7 0.62,-1.7 0.62,-1.7 0.62,-1.7 0.62,-1.7 -0.62,-1.7 -0.62,-1.7 -0.62,-1.7 -0.62,-1.7 -1.5,-0.82 -1.5,-0.82 -1.5,-0.82 -1.5,-0.82 -1.5,-0.5 -1.5,-0.5 -1.5,-0.5 -1.5,-0.5 -1.5,-0.5 -1.5,-0.5 -0.866,-0.5 -0.866,-0.5 -0.866,-0.5 -0.866,-0.5 -0.866,-0.5 -0.866,-0.5 -0.866,-0.5 -0.866,-0.5 -0.866,-0.5 -0.5,-0.866 0,-1 0.5,-0.866 0.866,-0.5 0.866,-0.5 0.866,-0.5 0.866,-0.5 0.866,-0.5 0.866,-0.5 0.866,-0.5 0.866,-0.5 0.866,-0.5 0.866,-0.5
  Top Layer region: -1.5,0.5 -1.5,0.5 -1.5,0.5 -1.5,0.5 -1.5,0.5 -1.5,0.5 -1.5,0.82 -1.5,0.82 -1.5,0.82 -1.5,0.82 -0.62,1.7 -0.62,1.7 -0.62,1.7 -0.62,1.7 -0.62,1.7 -0.62,1.7 -0.62,1.7 0.62,1.7 0.62,1.7 0.62,1.7 0.62,1.7 1.5,0.82 1.5,0.82 1.5,0.82 1.5,0.82 1.5,0.5 1.5,0.5 1.5,0.5 1.5,0.5 1.5,0.5 1.5,0.5 0.866,0.5 0.866,0.5 0.866,0.5 0.866,0.5 0.866,0.5 0.866,0.5 0.866,0.5 0.866,0.5 0.866,0.5 0.5,0.866 0,1 -0.5,0.866 -0.866,0.5 -0.866,0.5 -0.866,0.5 -0.866,0.5 -0.866,0.5 -0.866,0.5 -0.866,0.5 -0.866,0.5 -0.866,0.5 -0.866,0.5
  silkscreen extent -0.13,2.13 0.12,2.37, body extent -1.4,-1.4 1.4,1.4, height 1.5
CAPC0402(1005)60_L [mm] "Chip Capacitor, Body 1.0x0.5mm, Height 0.6mm, IPC High Density"
  rect 0.52x0.52 smd: 1(-0.4,0) 2(0.4,0)
  body extent -0.55,-0.3 0.55,0.3, height 0.6
CAPC0402(1005)60_N [mm] "Chip Capacitor, Body 1.0x0.5mm, Height 0.6mm, IPC Medium Density"
  rect 0.62x0.62 smd: 1(-0.45,0) 2(0.45,0)
  body extent -0.55,-0.3 0.55,0.3, height 0.6
CAPC0603(1608)55_N [mm] "Chip Capacitor, Body 1.6x0.8mm, Height 0.55mm, IPC Medium Density"
  rect 0.9x1 smd: 1(-0.8,0) 2(0.8,0)
  silkscreen extent -0.05,-0.4 0.05,0.4, body extent -0.87,-0.48 0.88,0.47, height 0.55
CAPC0603(1608)100_L [mm] "Chip Capacitor, Body 1.6x0.8mm, Height 1.0mm, IPC High Density"
  rect 0.7x0.9 smd: 1(-0.7,0) 2(0.7,0)
  silkscreen extent -0.05,-0.35 0.05,0.35, body extent -0.87,-0.47 0.88,0.48, height 1
CAPC0603(1608)100_N [mm] "Chip Capacitor, Body 1.6x0.8mm, Height 1.0mm, IPC Medium Density"
  rect 0.9x1 smd: 1(-0.8,0) 2(0.8,0)
  silkscreen extent -0.05,-0.4 0.05,0.4, body extent -0.87,-0.48 0.88,0.47, height 1
CAPC0805(2012)100_N [mm] "Chip Capacitor, Body 2.0x1.2mm, Height 1.0mm, IPC Medium Density"
  rect 1.15x1.45 smd: 1(-0.9,0) 2(0.9,0)
  silkscreen extent -0.05,-0.62 0.05,0.63, body extent -1.1,-0.72 1.1,0.73, height 1
CAPC0805(2012)145_L [mm] "Chip Capacitor, Body 2.0x1.2mm, Height 1.45mm, IPC High Density"
  rect 0.95x1.35 smd: 1(-0.8,0) 2(0.8,0)
  silkscreen extent -0.05,-0.58 0.05,0.58, body extent -1.1,-0.72 1.1,0.72, height 1.45
CAPC1206(3216)100_L [mm] "Chip Capacitor, Body 3.2x1.6mm, Height 1mm, IPC High Density"
  rect 0.95x1.7 smd: 1(-1.4,0) 2(1.4,0)
  silkscreen extent -0.55,-0.75 0.55,0.75, body extent -1.7,-0.9 1.7,0.9, height 1
CAPC1206(3216)190_L [mm] "Chip Capacitor, Body 3.2x1.6mm, Height 1.9mm, IPC High Density"
  rect 0.95x1.7 smd: 1(-1.4,0) 2(1.4,0)
  silkscreen extent -0.55,-0.75 0.55,0.75, body extent -1.7,-0.9 1.7,0.9, height 1.9
CPG196 [mm] "BGA, 196-Leads, Body 8x8mm, Pitch 0.5mm"
  round 0.25 smd: A1(-3.25,3.25) A2(-2.75,3.25) A3(-2.25,3.25) A4(-1.75,3.25) A5(-1.25,3.25) A6(-0.75,3.25) A7(-0.25,3.25) A8(0.25,3.25) A9(0.75,3.25) A10(1.25,3.25) A11(1.75,3.25) A12(2.25,3.25) A13(2.75,3.25) A14(3.25,3.25) B1(-3.25,2.75) B2(-2.75,2.75) B3(-2.25,2.75) B4(-1.75,2.75) B5(-1.25,2.75) B6(-0.75,2.75) B7(-0.25,2.75) B8(0.25,2.75) B9(0.75,2.75) B10(1.25,2.75) B11(1.75,2.75) B12(2.25,2.75) B13(2.75,2.75) B14(3.25,2.75) C1(-3.25,2.25) C2(-2.75,2.25) C3(-2.25,2.25) C4(-1.75,2.25) C5(-1.25,2.25) C6(-0.75,2.25) C7(-0.25,2.25) C8(0.25,2.25) C9(0.75,2.25) C10(1.25,2.25) C11(1.75,2.25) C12(2.25,2.25) C13(2.75,2.25) C14(3.25,2.25) D1(-3.25,1.75) D2(-2.75,1.75) D3(-2.25,1.75) D4(-1.75,1.75) D5(-1.25,1.75) D6(-0.75,1.75) D7(-0.25,1.75) D8(0.25,1.75) D9(0.75,1.75) D10(1.25,1.75) D11(1.75,1.75) D12(2.25,1.75) D13(2.75,1.75) D14(3.25,1.75) E1(-3.25,1.25) E2(-2.75,1.25) E3(-2.25,1.25) E4(-1.75,1.25) E5(-1.25,1.25) E6(-0.75,1.25) E7(-0.25,1.25) E8(0.25,1.25) E9(0.75,1.25) E10(1.25,1.25) E11(1.75,1.25) E12(2.25,1.25) E13(2.75,1.25) E14(3.25,1.25) F1(-3.25,0.75) F2(-2.75,0.75) F3(-2.25,0.75) F4(-1.75,0.75) F5(-1.25,0.75) F6(-0.75,0.75) F7(-0.25,0.75) F8(0.25,0.75) F9(0.75,0.75) F10(1.25,0.75) F11(1.75,0.75) F12(2.25,0.75) F13(2.75,0.75) F14(3.25,0.75) G1(-3.25,0.25) G2(-2.75,0.25) G3(-2.25,0.25) G4(-1.75,0.25) G5(-1.25,0.25) G6(-0.75,0.25) G7(-0.25,0.25) G8(0.25,0.25) G9(0.75,0.25) G10(1.25,0.25) G11(1.75,0.25) G12(2.25,0.25) G13(2.75,0.25) G14(3.25,0.25) H1(-3.25,-0.25) H2(-2.75,-0.25) H3(-2.25,-0.25) H4(-1.75,-0.25) H5(-1.25,-0.25) H6(-0.75,-0.25) H7(-0.25,-0.25) H8(0.25,-0.25) H9(0.75,-0.25) H10(1.25,-0.25) H11(1.75,-0.25) H12(2.25,-0.25) H13(2.75,-0.25) H14(3.25,-0.25) J1(-3.25,-0.75) J2(-2.75,-0.75) J3(-2.25,-0.75) J4(-1.75,-0.75) J5(-1.25,-0.75) J6(-0.75,-0.75) J7(-0.25,-0.75) J8(0.25,-0.75) J9(0.75,-0.75) J10(1.25,-0.75) J11(1.75,-0.75) J12(2.25,-0.75) J13(2.75,-0.75) J14(3.25,-0.75) K1(-3.25,-1.25) K2(-2.75,-1.25) K3(-2.25,-1.25) K4(-1.75,-1.25) K5(-1.25,-1.25) K6(-0.75,-1.25) K7(-0.25,-1.25) K8(0.25,-1.25) K9(0.75,-1.25) K10(1.25,-1.25) K11(1.75,-1.25) K12(2.25,-1.25) K13(2.75,-1.25) K14(3.25,-1.25) L1(-3.25,-1.75) L2(-2.75,-1.75) L3(-2.25,-1.75) L4(-1.75,-1.75) L5(-1.25,-1.75) L6(-0.75,-1.75) L7(-0.25,-1.75) L8(0.25,-1.75) L9(0.75,-1.75) L10(1.25,-1.75) L11(1.75,-1.75) L12(2.25,-1.75) L13(2.75,-1.75) L14(3.25,-1.75) M1(-3.25,-2.25) M2(-2.75,-2.25) M3(-2.25,-2.25) M4(-1.75,-2.25) M5(-1.25,-2.25) M6(-0.75,-2.25) M7(-0.25,-2.25) M8(0.25,-2.25) M9(0.75,-2.25) M10(1.25,-2.25) M11(1.75,-2.25) M12(2.25,-2.25) M13(2.75,-2.25) M14(3.25,-2.25) N1(-3.25,-2.75) N2(-2.75,-2.75) N3(-2.25,-2.75) N4(-1.75,-2.75) N5(-1.25,-2.75) N6(-0.75,-2.75) N7(-0.25,-2.75) N8(0.25,-2.75) N9(0.75,-2.75) N10(1.25,-2.75) N11(1.75,-2.75) N12(2.25,-2.75) N13(2.75,-2.75) N14(3.25,-2.75) P1(-3.25,-3.25) P2(-2.75,-3.25) P3(-2.25,-3.25) P4(-1.75,-3.25) P5(-1.25,-3.25) P6(-0.75,-3.25) P7(-0.25,-3.25) P8(0.25,-3.25) P9(0.75,-3.25) P10(1.25,-3.25) P11(1.75,-3.25) P12(2.25,-3.25) P13(2.75,-3.25) P14(3.25,-3.25)
  silkscreen extent -4.77,-4 4,4, body extent -4,-4 4,4, height 1.2
CSR-CSR1010A05-IQQM-R-QFN32_M [mm] "QFN, 32-Leads, Body 5.1x5.1mm, Pitch 0.5mm, Thermal Pad 3.2x3.2mm, IPC Low Density"
  oval 0.85x0.25 smd: 1(-2.575,1.75) 2(-2.575,1.25) 3(-2.575,0.75) 4(-2.575,0.25) 5(-2.575,-0.25) 6(-2.575,-0.75) 7(-2.575,-1.25) 8(-2.575,-1.75) 17(2.575,-1.75) 18(2.575,-1.25) 19(2.575,-0.75) 20(2.575,-0.25) 21(2.575,0.25) 22(2.575,0.75) 23(2.575,1.25) 24(2.575,1.75)
  oval 0.25x0.85 smd: 9(-1.75,-2.575) 10(-1.25,-2.575) 11(-0.75,-2.575) 12(-0.25,-2.575) 13(0.25,-2.575) 14(0.75,-2.575) 15(1.25,-2.575) 16(1.75,-2.575) 25(1.75,2.575) 26(1.25,2.575) 27(0.75,2.575) 28(0.25,2.575) 29(-0.25,2.575) 30(-0.75,2.575) 31(-1.25,2.575) 32(-1.75,2.575)
  rect 3.2x3.2 smd: 33(0,0)
  silkscreen extent -3.47,-2.7 2.7,2.7, body extent -2.55,-2.55 2.55,2.55, height 0.6
DRC10-2400X1650TP [mm] "SON, 10-Leads, Body 3x3mm, Pitch 0.5mm, Thermal Pad 2.4x1.65mm, TI Recommended"
  oval 0.85x0.28 smd paste-0.025 mask+0: 1(-1.475,1) 2(-1.475,0.5) 3(-1.475,0) 4(-1.475,-0.5) 5(-1.475,-1) 6(1.475,-1) 7(1.475,-0.5) 8(1.475,0) 9(1.475,0.5) 10(1.475,1)
  rect 1.65x2.4 smd paste-0.825 mask+0: 11(0,0)
  Top Layer region: -0.39,1.9 -0.11,1.9 -0.11,1.2 -0.39,1.2
  Top Layer region: 0.39,1.2 0.11,1.2 0.11,1.9 0.39,1.9
  Top Layer region: 0.39,-1.9 0.11,-1.9 0.11,-1.2 0.39,-1.2
  Top Layer region: -0.39,-1.2 -0.11,-1.2 -0.11,-1.9 -0.39,-1.9
  silkscreen extent -2.15,-1.7 1.7,1.7, body extent -1.55,-1.55 1.55,1.55, height 1
HDR2X1-P254-V-M [mm] "Header IDC, 2 x 1 Pin Vertical 2.54mm Pitch (Non-Boxed, Male)"
  rect 1.5x1.5 hole 0.9: 1(0,0)
  round 1.5 hole 0.9: 2(0,-2.54)
  silkscreen extent -1.27,-3.81 1.27,1.27, body extent -1.27,-3.81 1.27,1.27, height 8.4
HDR5X1-P254-V-M-A [mm] "Male Header IDC, 1 x 5 Pin Vertical 2.54mm Pitch, 5.84mm Mated Height"
  rect 1.5x1.5 hole 0.9: 1(0,0)
  round 1.5 hole 0.9: 2(2.54,0) 3(5.08,0) 4(7.62,0) 5(10.16,0)
  silkscreen extent -1.27,-1.27 11.43,1.27, body extent -1.27,-1.24 11.43,1.27, height 8.35
HOSC-L500HW320H105-4 [mm] "Quartz Crystal, Body 5.0 x 3.2 mm, Height 1.05mm"
  rect 1.2x0.9 smd: 1(-1.85,-1.1) 2(1.85,-1.1) 3(1.85,1.1) 4(-1.85,1.1)
  silkscreen extent -2.03,-2.28 0.89,1.6, body extent -2.5,-1.6 2.5,1.6, height 1.05
ISSI-48L-TFBGA [mm] "BGA, 48-Leads, Body 6.00x8.00mmx1.20mm, Pitch 0.75mm"
  round 0.35 smd: A1(-1.875,2.625) A2(-1.125,2.625) A3(-0.375,2.625) A4(0.375,2.625) A5(1.125,2.625) A6(1.875,2.625) B1(-1.875,1.875) B2(-1.125,1.875) B3(-0.375,1.875) B4(0.375,1.875) B5(1.125,1.875) B6(1.875,1.875) C1(-1.875,1.125) C2(-1.125,1.125) C3(-0.375,1.125) C4(0.375,1.125) C5(1.125,1.125) C6(1.875,1.125) D1(-1.875,0.375) D2(-1.125,0.375) D3(-0.375,0.375) D4(0.375,0.375) D5(1.125,0.375) D6(1.875,0.375) E1(-1.875,-0.375) E2(-1.125,-0.375) E3(-0.375,-0.375) E4(0.375,-0.375) E5(1.125,-0.375) E6(1.875,-0.375) F1(-1.875,-1.125) F2(-1.125,-1.125) F3(-0.375,-1.125) F4(0.375,-1.125) F5(1.125,-1.125) F6(1.875,-1.125) G1(-1.875,-1.875) G2(-1.125,-1.875) G3(-0.375,-1.875) G4(0.375,-1.875) G5(1.125,-1.875) G6(1.875,-1.875) H1(-1.875,-2.625) H2(-1.125,-2.625) H3(-0.375,-2.625) H4(0.375,-2.625) H5(1.125,-2.625) H6(1.875,-2.625)
  silkscreen extent -3.77,-4 3,4, body extent -3,-4 3,4, height 1.2
ITTI-21C00047-16.000MHz-4_V [mm] "Hand Drawn, 4-Leads, Body 3.2x2.5 mm"
  rect 1.4x1.2 smd: 1(-1.1,-0.8) 2(1.1,-0.8) 3(1.1,0.8) 4(-1.1,0.8)
  silkscreen extent -2.48,-0.92 -2.23,-0.68, body extent -1.6,-1.25 1.6,1.25, height 0.9
ITTI-14340272-32.768KHz-2_V [mm] "Hand Drawn, 2-Leads, Body 3.2x1.5mm, Pitch 2.5mm"
  rect 1x1.8 smd: 1(-1.25,0) 2(1.25,0)
  silkscreen extent -2.43,-0.75 0.35,0.75, body extent -1.6,-0.75 1.6,0.75, height 0.9
JNFU-TVAF06-2 [mm] "Switch, Push Button, SMD; 2 Leads; Body 2.9 x 3.9 mm (LxW typ)"
  rect 1.05x1.6 smd: 1(-2.225,0) 2(2.225,0)
  round 0.4 hole 0.75 unplated: MH1(0,0.9) MH2(0,-0.9)
  silkscreen extent -2.7,-1.5 2,1.5, body extent -2,-1.5 2,1.5, height 2
KEYSTONE-CLIPS_54-3_V [mm] "3-Pin Hand Drawn, Body 18.102x13.004mm"
  round 2.4 hole 1.9: 1(-2.55,4.702) 2(2.55,4.702) 3(0,-2.898)
  silkscreen extent -2.8,7.1 -2.3,7.6, body extent -9.05,-6.5 9.05,6.5, height 18
KING-0603(1608)25-Green [mm] "LED, SMT, 0603(1608), 0.25mm thickness, Green"
  rect 1x1 smd paste+0 mask+0: 1(0.85,0) 2(-0.85,0)
  silkscreen extent -1.97,-0.85 1.6,0.85, body extent -0.8,-0.4 0.8,0.4, height 0.25
KING-0603(1608)25-Orange [mm] "LED, SMT, 0603(1608), 0.25mm thickness, Orange"
  rect 1x1 smd paste+0 mask+0: 1(0.85,0) 2(-0.85,0)
  silkscreen extent -1.97,-0.85 1.6,0.85, body extent -0.8,-0.4 0.8,0.4, height 0.25
KING-0603(1608)25-Red [mm] "LED, SMT, 0603(1608), 0.25mm thickness, Red"
  rect 1x1 smd paste+0 mask+0: 1(0.85,0) 2(-0.85,0)
  silkscreen extent -1.97,-0.85 1.6,0.85, body extent -0.8,-0.4 0.8,0.4, height 0.25
LGA16-3X3X1_L [mm] "PQFN, 16-Leads, Body 3x3mm, Pitch 0.5mm, IPC High Density"
  oval 0.6x0.25 smd: 1(-1.5,1) 2(-1.5,0.5) 3(-1.5,0) 4(-1.5,-0.5) 5(-1.5,-1) 9(1.5,-1) 10(1.5,-0.5) 11(1.5,0) 12(1.5,0.5) 13(1.5,1)
  oval 0.25x0.6 smd: 6(-0.5,-1.5) 7(0,-1.5) 8(0.5,-1.5) 14(0.5,1.5) 15(0,1.5) 16(-0.5,1.5)
  silkscreen extent -2.5,-1.73 1.73,1.73, body extent -1.58,-1.58 1.58,1.58, height 1
MCHP-SOIC-SN8_N [mm] "SOIC, 8-Leads, Body 4.9x3.9mm, Pitch 1.27mm, IPC Medium Density"
  oval 2.05x0.6 smd: 1(-2.425,1.905) 2(-2.425,0.635) 3(-2.425,-0.635) 4(-2.425,-1.905) 5(2.425,-1.905) 6(2.425,-0.635) 7(2.425,0.635) 8(2.425,1.905)
  silkscreen extent -2.55,-2.45 1,2.88, body extent -1.95,-2.45 1.95,2.45, height 1.75
MOLX-73412-0110 [mm] "Microcoaxial RF, 50 Ohm, PCB Vertical Jack Receptacle, SMT, 1.25mm Mounted Height"
  rect 1x1.1 smd: 1(0,-1.5) 3(0,1.55)
  rect 1x2.2 smd: 2(-1.5,0) 4(1.5,0)
  silkscreen extent -0.12,-2.79 0.13,-2.54, body extent -1.3,-1.3 1.3,1.3, height 1.3
MUR-LFB212G45SG8A143-4 [mm] "Hand Drawn, 4-Leads, Body 2x1.25mm"
  rect 1.65x0.75 smd: 1(0,0.75) 3(0,-0.75)
  rect 0.95x0.35 smd: 2(1.225,0) 4(-1.225,0)
  silkscreen extent -0.12,1.55 0.12,1.8, body extent -1,-0.63 1,0.63, height 0.95
MURA-IND0402_V [mm] "SMT Inductor, 2 Leads, Body 1x0.5 mm"
  rect 0.525x0.55 smd: 1(0.463,0) 2(-0.462,0)
  silkscreen extent 1.13,0.58 1.38,0.82, body extent -0.5,-0.25 0.5,0.25, height 0.55
MXIC-USON-8_V [mm] "USON, 8-Leads, Body 3.1x2.1mm, Pitch 0.5mm, Thermal Pad 1.6x0.2mm"
  rect 0.72x0.25 smd mask+0: 1(-1.5,0.75) 2(-1.5,0.25) 3(-1.5,-0.25) 4(-1.5,-0.75) 5(1.5,-0.75) 6(1.5,-0.25) 7(1.5,0.25) 8(1.5,0.75)
  rect 0.2x1.6 smd mask+0: 9(0,0)
  silkscreen extent -2.25,0.73 -2.15,0.82, body extent -1.55,-1.05 1.55,1.05, height 0.6
NXP-SOT223 [mm] "SOT223, 4-Leads, Body 6.5x3.5mm, Pitch 2.3mm, Lead Span 7mm, IPC Medium Density"
  rect 2.2x1 smd: 1(-3,2.3) 2(-3,0) 3(-3,-2.3)
  rect 2.2x3.3 smd: 4(3,0)
  silkscreen extent -3.12,-3.35 1.6,3.47, body extent -1.85,-3.35 1.85,3.35, height 1.8
ONSC-318G-02 [mm] "TSOP, 6-Leads, Body 3.1x1.7mm (max), Pitch 0.95mm, Height 1.1mm"
  oval 1.3x0.6 smd: 1(-1.05,0.95) 2(-1.05,0) 3(-1.05,-0.95) 4(1.05,-0.95) 5(1.05,0) 6(1.05,0.95)
  silkscreen extent -1.18,1.68 -0.93,1.92, body extent -0.85,-1.55 0.85,1.55, height 1.1
QFN64_2_N [mm] "QFN, 64-Leads, Body 9x9mm, Pitch 0.5mm, Thermal Pad 4.5x4.5mm, IPC Medium Density"
  oval 0.75x0.25 smd: 1(-4.525,3.75) 2(-4.525,3.25) 3(-4.525,2.75) 4(-4.525,2.25) 5(-4.525,1.75) 6(-4.525,1.25) 7(-4.525,0.75) 8(-4.525,0.25) 9(-4.525,-0.25) 10(-4.525,-0.75) 11(-4.525,-1.25) 12(-4.525,-1.75) 13(-4.525,-2.25) 14(-4.525,-2.75) 15(-4.525,-3.25) 16(-4.525,-3.75) 33(4.525,-3.75) 34(4.525,-3.25) 35(4.525,-2.75) 36(4.525,-2.25) 37(4.525,-1.75) 38(4.525,-1.25) 39(4.525,-0.75) 40(4.525,-0.25) 41(4.525,0.25) 42(4.525,0.75) 43(4.525,1.25) 44(4.525,1.75) 45(4.525,2.25) 46(4.525,2.75) 47(4.525,3.25) 48(4.525,3.75)
  oval 0.25x0.75 smd: 17(-3.75,-4.525) 18(-3.25,-4.525) 19(-2.75,-4.525) 20(-2.25,-4.525) 21(-1.75,-4.525) 22(-1.25,-4.525) 23(-0.75,-4.525) 24(-0.25,-4.525) 25(0.25,-4.525) 26(0.75,-4.525) 27(1.25,-4.525) 28(1.75,-4.525) 29(2.25,-4.525) 30(2.75,-4.525) 31(3.25,-4.525) 32(3.75,-4.525) 49(3.75,4.525) 50(3.25,4.525) 51(2.75,4.525) 52(2.25,4.525) 53(1.75,4.525) 54(1.25,4.525) 55(0.75,4.525) 56(0.25,4.525) 57(-0.25,4.525) 58(-0.75,4.525) 59(-1.25,4.525) 60(-1.75,4.525) 61(-2.25,4.525) 62(-2.75,4.525) 63(-3.25,4.525) 64(-3.75,4.525)
  rect 4.5x4.5 smd: 65(0,0)
  silkscreen extent -5.46,-4.69 4.69,4.69, body extent -4.54,-4.54 4.54,4.54, height 1
Qiwei-SMD [mm] "Mini-USB Connector"
  rect 2.8x0.5 smd: 1(0,0) 2(0,-0.8) 3(0,-1.6) 4(0,-2.4) 5(0,-3.2)
  rect 3.5x2.05 smd: 6(0.025,3.325) 8(0.025,-6.525)
  rect 4x2.05 smd: 7(-4.225,3.325) 9(-4.225,-6.525)
  round 0.9 hole 0.9 unplated: X(-2.325,-3.8) Y(-2.325,0.6)
  silkscreen extent -8.25,-4.85 2,1.65, body extent -8.22,-6.56 0.78,3.34, height 3.95
RESC0402(1005)_L [mm] "Chip Resistor, Body 1.0x0.5mm, IPC High Density"
  rect 0.45x0.55 smd: 1(-0.45,0) 2(0.45,0)
  body extent -0.52,-0.27 0.53,0.28, height 0.4
RESC0402(1005)_M [mm] "Chip Resistor, Body 1.0x0.5mm, IPC Low Density"
  rect 0.65x0.75 smd: 1(-0.55,0) 2(0.55,0)
  body extent -0.52,-0.28 0.53,0.28, height 0.4
RESC0402(1005)_N [mm] "Chip Resistor, Body 1.0x0.5mm, IPC Medium Density"
  rect 0.55x0.65 smd: 1(-0.5,0) 2(0.5,0)
  body extent -0.52,-0.27 0.53,0.28, height 0.4
RESC0603(1608)_L [mm] "Chip Resistor, Body 1.6x0.8mm, IPC High Density"
  rect 0.7x0.9 smd: 1(-0.7,0) 2(0.7,0)
  silkscreen extent -0.05,-0.35 0.05,0.35, body extent -0.85,-0.47 0.85,0.47, height 0.6
SMD-0603 [mm] "Chip Inductor, 2-Leads, Body 1.6x0.8mm"
  rect 0.85x0.7 smd: 1(-0.775,0) 2(0.775,0)
  body extent -0.8,-0.4 0.8,0.4, height 0.79
SOT-23-OT6_N [mm] "SOT23, 6-Leads, Body 2.9x1.7mm, Pitch 0.95mm, Lead Span 2.8mm, IPC Medium Density"
  rect 1.1x0.65 smd: 1(-1.2,0.95) 2(-1.2,0) 3(-1.2,-0.95) 4(1.2,-0.95) 5(1.2,0) 6(1.2,0.95)
  silkscreen extent -1.32,-1.55 0.25,1.95, body extent -0.9,-1.55 0.9,1.55, height 1.45
SSOP-16_N [mm] "SOP, 16-Leads, Body 4.9x3.9mm, Pitch 0.635mm, IPC Medium Density"
  oval 2.25x0.4 smd: 1(-2.375,2.222) 2(-2.375,1.587) 3(-2.375,0.952) 4(-2.375,0.317) 5(-2.375,-0.318) 6(-2.375,-0.953) 7(-2.375,-1.588) 8(-2.375,-2.222) 9(2.375,-2.222) 10(2.375,-1.587) 11(2.375,-0.952) 12(2.375,-0.317) 13(2.375,0.318) 14(2.375,0.953) 15(2.375,1.588) 16(2.375,2.222)
  silkscreen extent -2.5,-2.5 0.9,3.1, body extent -1.99,-2.5 1.99,2.5, height 1.76
SUMI-CDRH2D14NP-1R5NC-2_V [mm] "Hand Drawn, 2-Leads, Body 3x3mm, Pitch 3mm"
  rect 1.3x1.3 smd rot 45: 1(-1.061,1.061) 2(1.061,-1.061)
  silkscreen extent -2.03,-1.48 1.5,2.03, body extent -1.48,-1.48 1.5,1.5, height 1.55
TDK-0805(2012)125 [mm] "Chip Inductor, 2-Leads, Body 2.0x1.2mm, Height 1.25mm"
  rect 0.8x1.2 smd: 1(-0.75,0) 2(0.75,0)
  body extent -1.1,-0.7 1.1,0.7, height 1.25
TDK-CHIP-2_V [mm] "CHIP, 2-Leads, Body 1x0.5mm, Pitch 0.9mm"
  rect 0.5x0.5 smd: 1(-0.45,0) 2(0.45,0)
  silkscreen extent -1.37,-0.12 -1.13,0.13, body extent -0.5,-0.25 0.5,0.25, height 0.5
TG-RECE-20369-001E-4_V [mm] "Hand Drawn, 4-Leads, Body 1.7x1.7mm"
  rect 0.5x1 smd: 1(0,-1.15)
  rect 0.6x1.5 smd: 2(1,0) 3(-1,0)
  rect 0.5x0.55 smd: 4(0,1.025)
  silkscreen extent -0.3,-2.32 0.3,0.3, body extent -0.85,-0.85 0.85,0.85, height 0.85
TI-CC3000MOD-46_V [mm] "Module, 46-Leads, Body 16.3x13.5mm"
  rect 1.2x0.7 smd: 1(-5.85,5.4) 2(-5.85,4.2) 3(-5.85,3) 4(-5.85,1.8) 5(-5.85,0.6) 6(-5.85,-0.6) 7(-5.85,-1.8) 8(-5.85,-3) 9(-5.85,-4.2) 10(-5.85,-5.4) 19(5.85,-5.4) 20(5.85,-4.2) 21(5.85,-3) 22(5.85,-1.8) 23(5.85,-0.6) 24(5.85,0.6) 25(5.85,1.8) 26(5.85,3) 27(5.85,4.2) 28(5.85,5.4)
  rect 0.7x1.2 smd: 11(-4.2,-7.25) 12(-3,-7.25) 13(-1.8,-7.25) 14(-0.6,-7.25) 15(0.6,-7.25) 16(1.8,-7.25) 17(3,-7.25) 18(4.2,-7.25) 29(4.2,7.25) 30(3,7.25) 31(1.8,7.25) 32(0.6,7.25) 33(-0.6,7.25) 34(-1.8,7.25) 35(-3,7.25) 36(-4.2,7.25)
  rect 2.4x1.9 smd: 37(-2.15,3.6) 38(-2.15,0) 39(-2.15,-3.6) 40(2.15,3.6) 41(2.15,0) 42(2.15,-3.6)
  rect 1.2x1.2 smd: 43(-5.85,7.25) 44(-5.85,-7.25) 45(5.85,-7.25) 46(5.85,7.25)
  silkscreen extent -7.48,5.28 -7.23,5.52, body extent -6.75,-8.15 6.75,8.15, height 2
TI-DSK10-2000X1200TP_V [mm] "SON, 10-Leads, Body 2.5x2.5mm, Pitch 0.5mm, Thermal Pad 2x1.2 mm"
  rect 0.8x0.28 smd: 1(-1.25,1) 2(-1.25,0.5) 3(-1.25,0) 4(-1.25,-0.5) 5(-1.25,-1) 6(1.25,-1) 7(1.25,-0.5) 8(1.25,0) 9(1.25,0.5) 10(1.25,1)
  rect 1.2x2 smd: 11(0,0)
  silkscreen extent -2.25,0.91 -2,1.16, body extent -1.25,-1.25 1.25,1.25, height 0.8
TI-RHA40-4500X4500TP_V [mm] "QFN, 40-Leads, Body 6x6mm, Pitch 0.5mm, Thermal Pad 4.5x4.5mm"
  oval 0.85x0.28 smd: 1(-2.975,2.25) 2(-2.975,1.75) 3(-2.975,1.25) 4(-2.975,0.75) 5(-2.975,0.25) 6(-2.975,-0.25) 7(-2.975,-0.75) 8(-2.975,-1.25) 9(-2.975,-1.75) 10(-2.975,-2.25) 21(2.975,-2.25) 22(2.975,-1.75) 23(2.975,-1.25) 24(2.975,-0.75) 25(2.975,-0.25) 26(2.975,0.25) 27(2.975,0.75) 28(2.975,1.25) 29(2.975,1.75) 30(2.975,2.25)
  oval 0.28x0.85 smd: 11(-2.25,-2.975) 12(-1.75,-2.975) 13(-1.25,-2.975) 14(-0.75,-2.975) 15(-0.25,-2.975) 16(0.25,-2.975) 17(0.75,-2.975) 18(1.25,-2.975) 19(1.75,-2.975) 20(2.25,-2.975) 31(2.25,2.975) 32(1.75,2.975) 33(1.25,2.975) 34(0.75,2.975) 35(0.25,2.975) 36(-0.25,2.975) 37(-0.75,2.975) 38(-1.25,2.975) 39(-1.75,2.975) 40(-2.25,2.975)
  rect 4.5x4.5 smd: 41(0,0)
  silkscreen extent -4.07,-3 3,3, body extent -3,-3 3,3, height 1
TP-SM-C-100 [mm] "Test Point, Surface Mounting, Circular, Pad Diameter 1mm"
  round 1 smd: 1(0,0)